# Altium PCB STM_System_Board.PCBDOC (part 1 of 16)
Units mm, origin at the board's own origin, x right, y up, seen from the top; angles counter-clockwise.
Board outline 222.53 x 100.01 mm, 6 copper layers (Top Layer, Int1 (GND), Int2 (Sign), Layer 1, Layer 2, Bottom Layer), stack 1.526 mm thick; 702 components, 774 nets, 3596 pads, 1988 vias.
Unrouted connection lines stored in the file: 1.
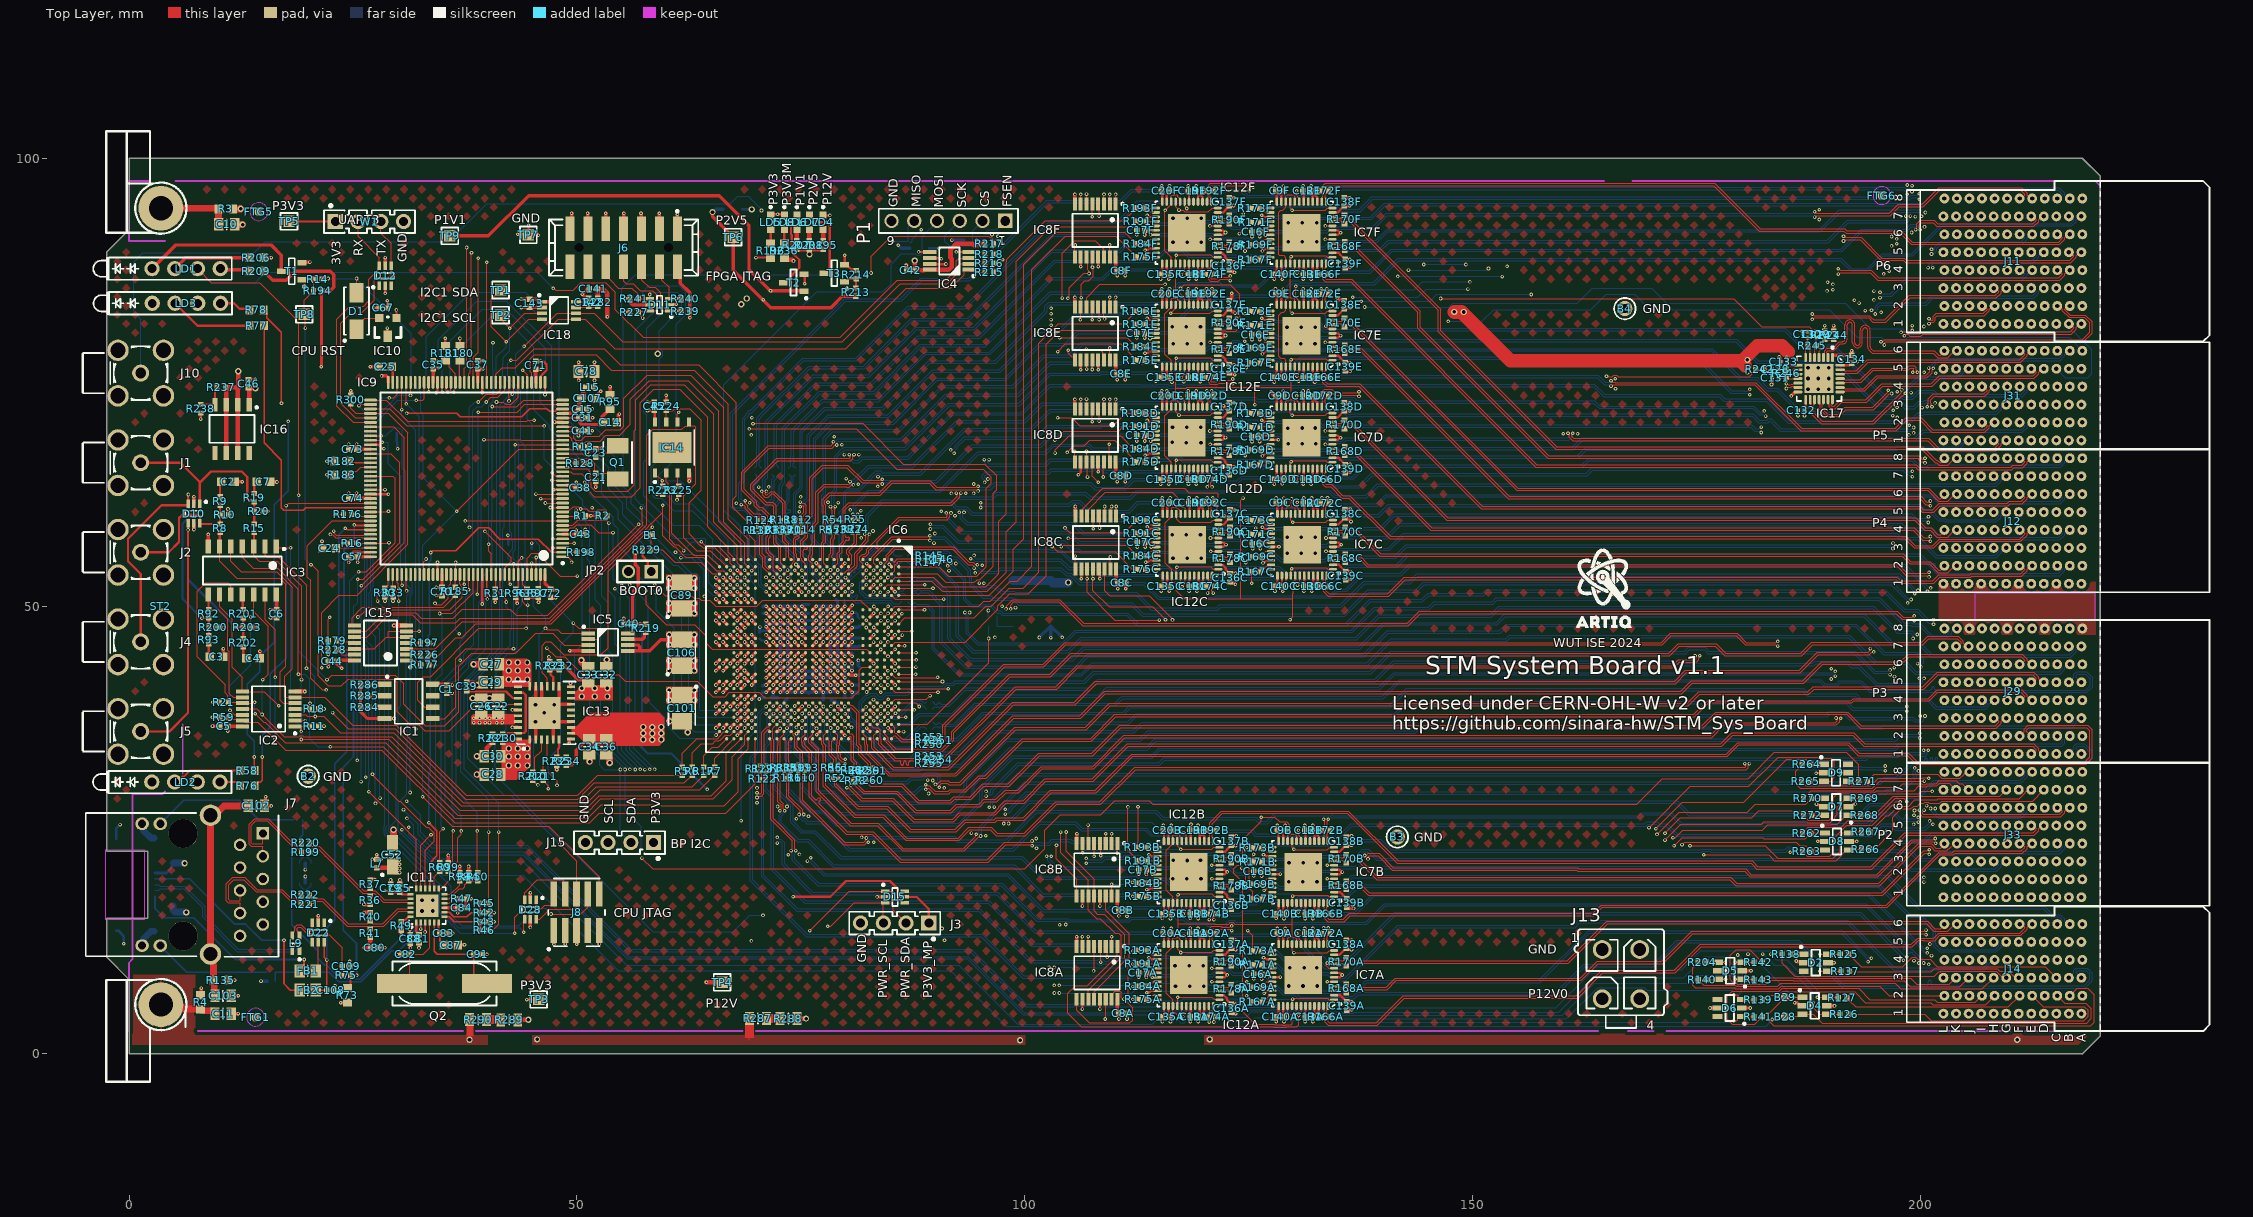
[diagram p0: Top Layer view]
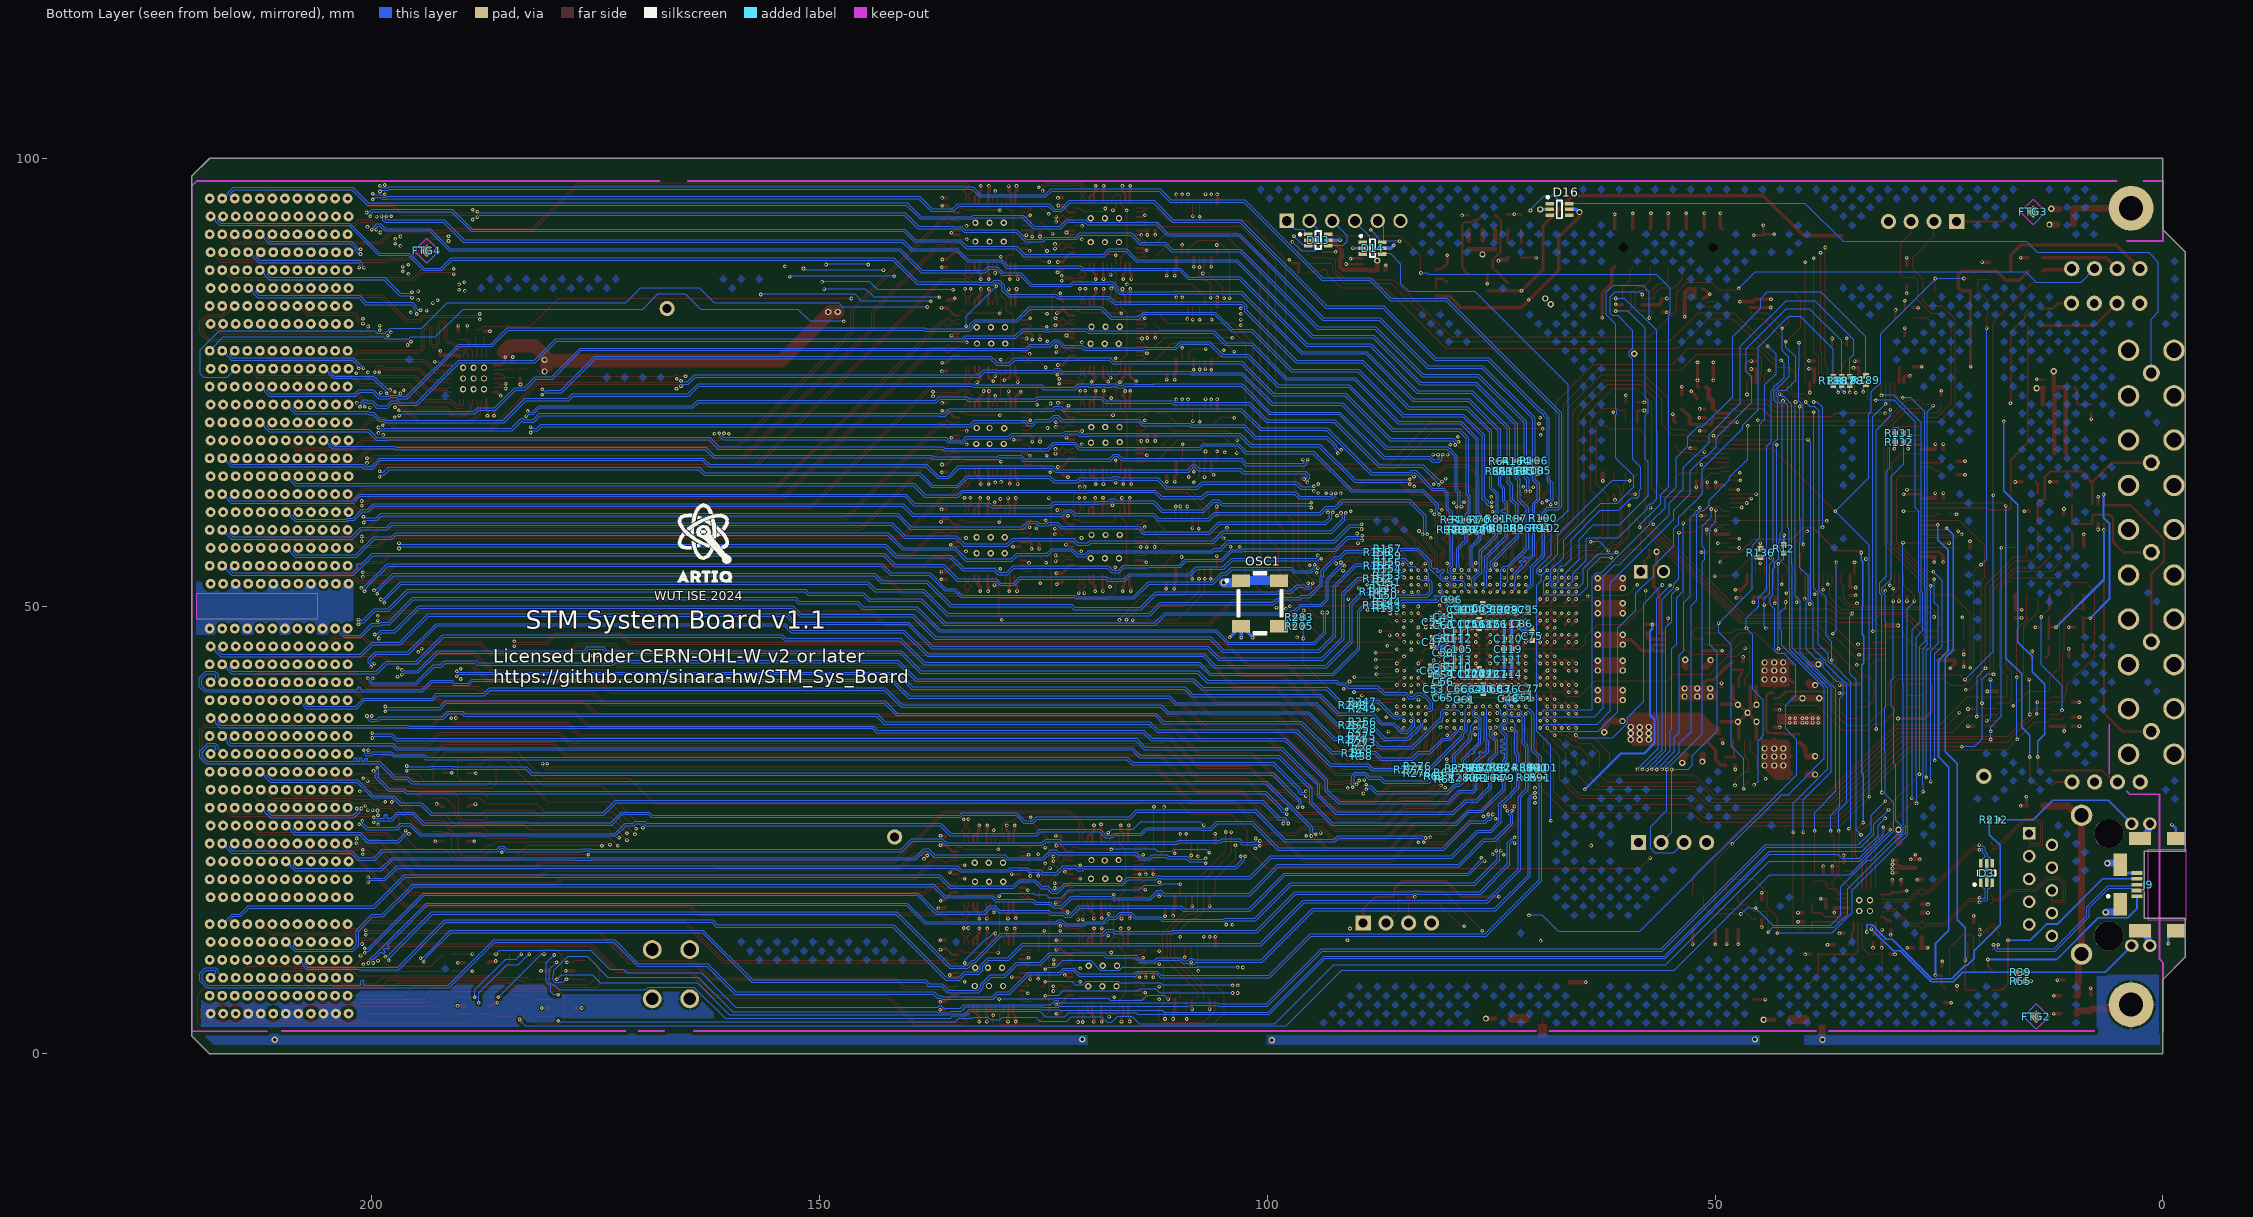
[diagram p1: Bottom Layer view, seen from below]
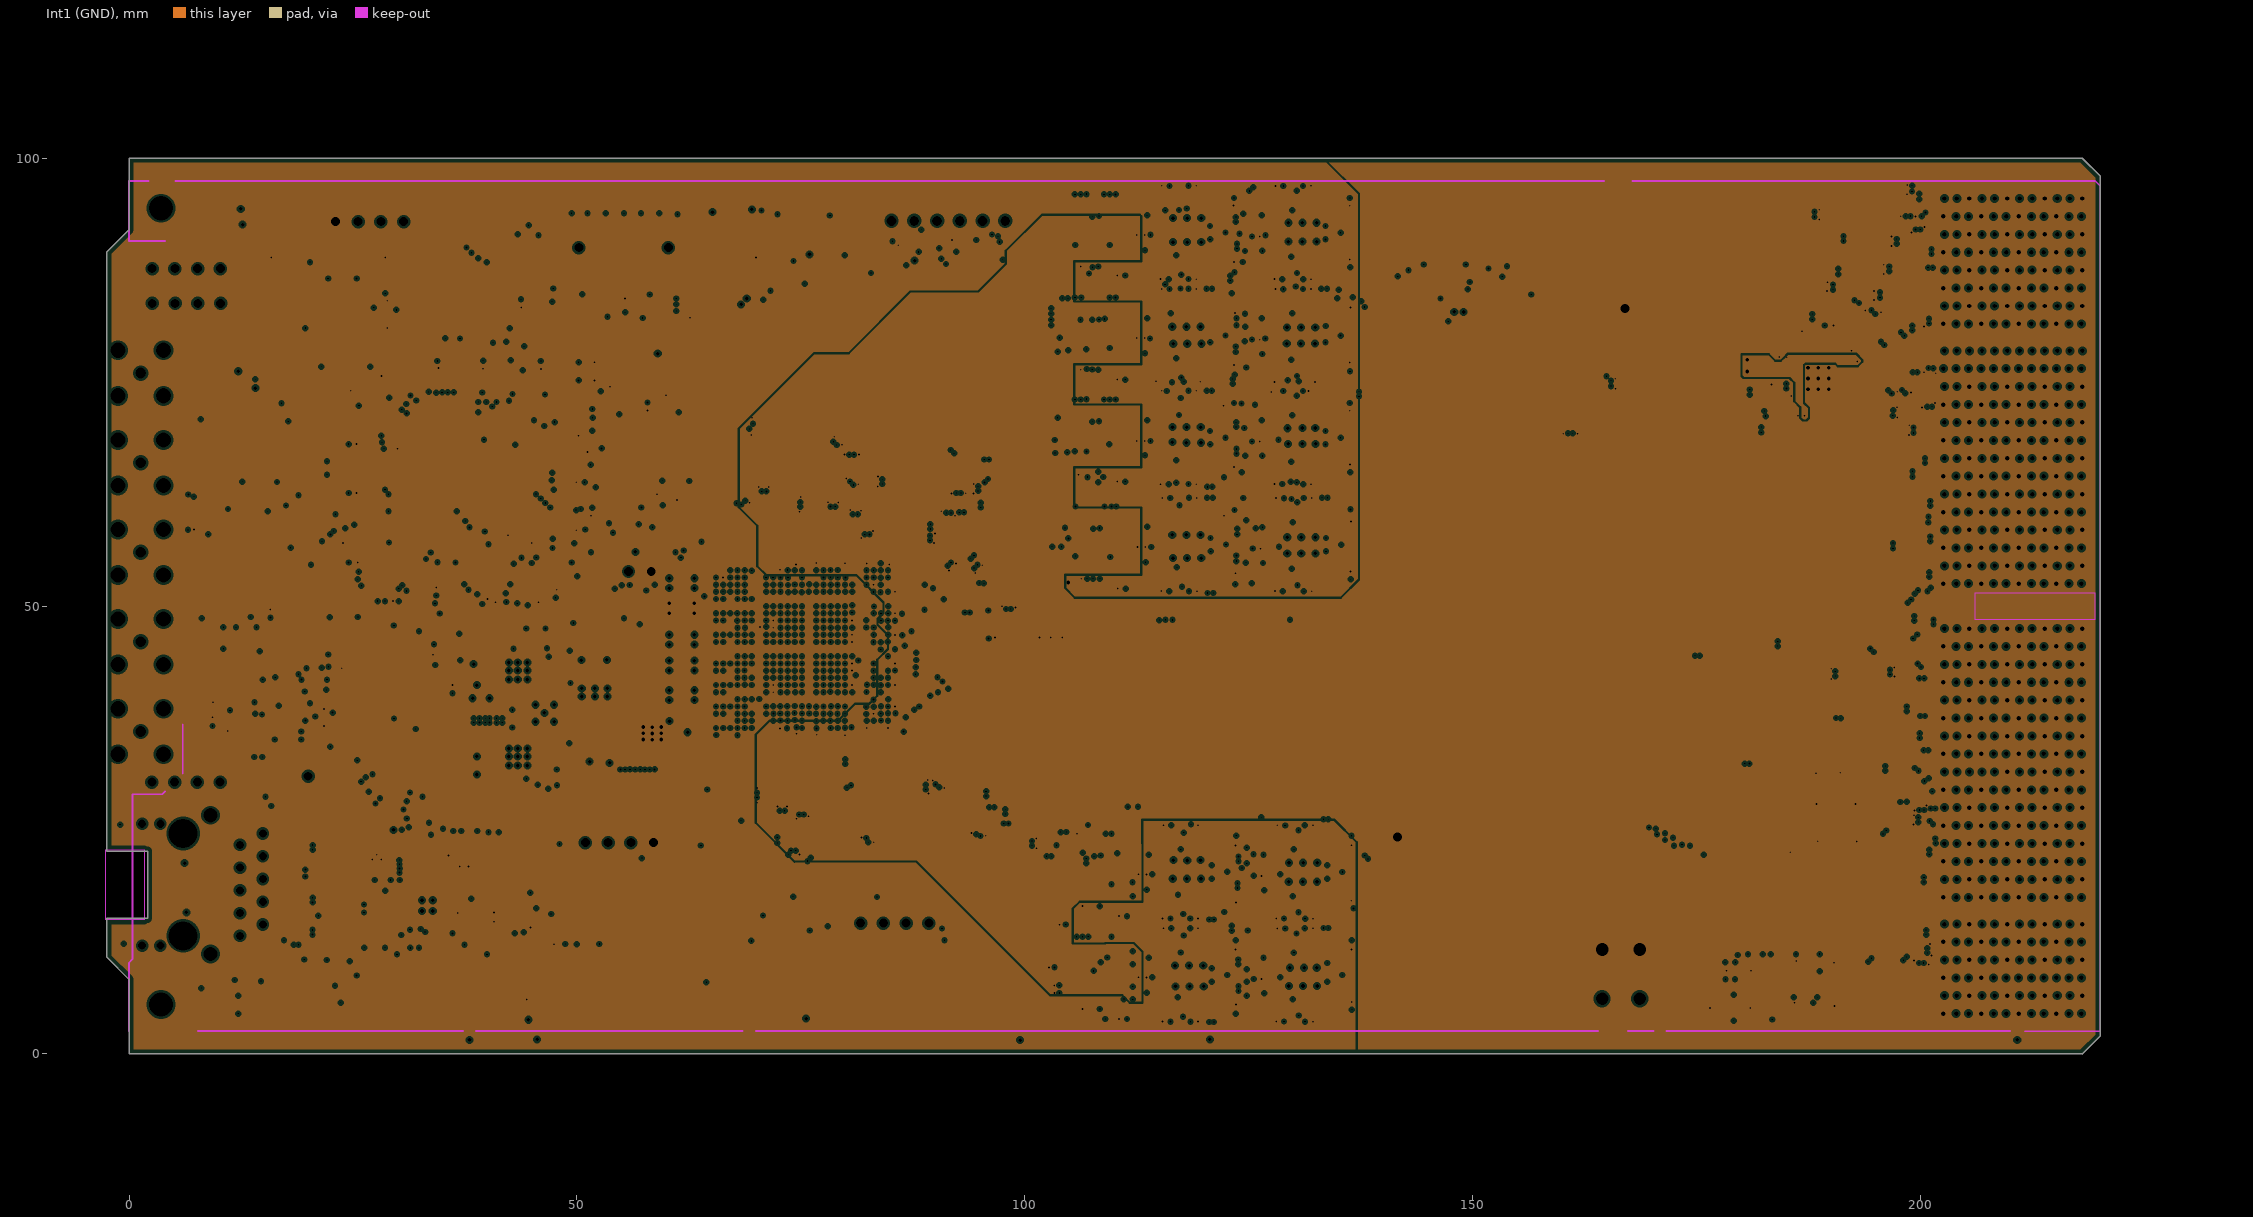
[diagram p2: Int1 (GND), clearances drawn from the general rule]
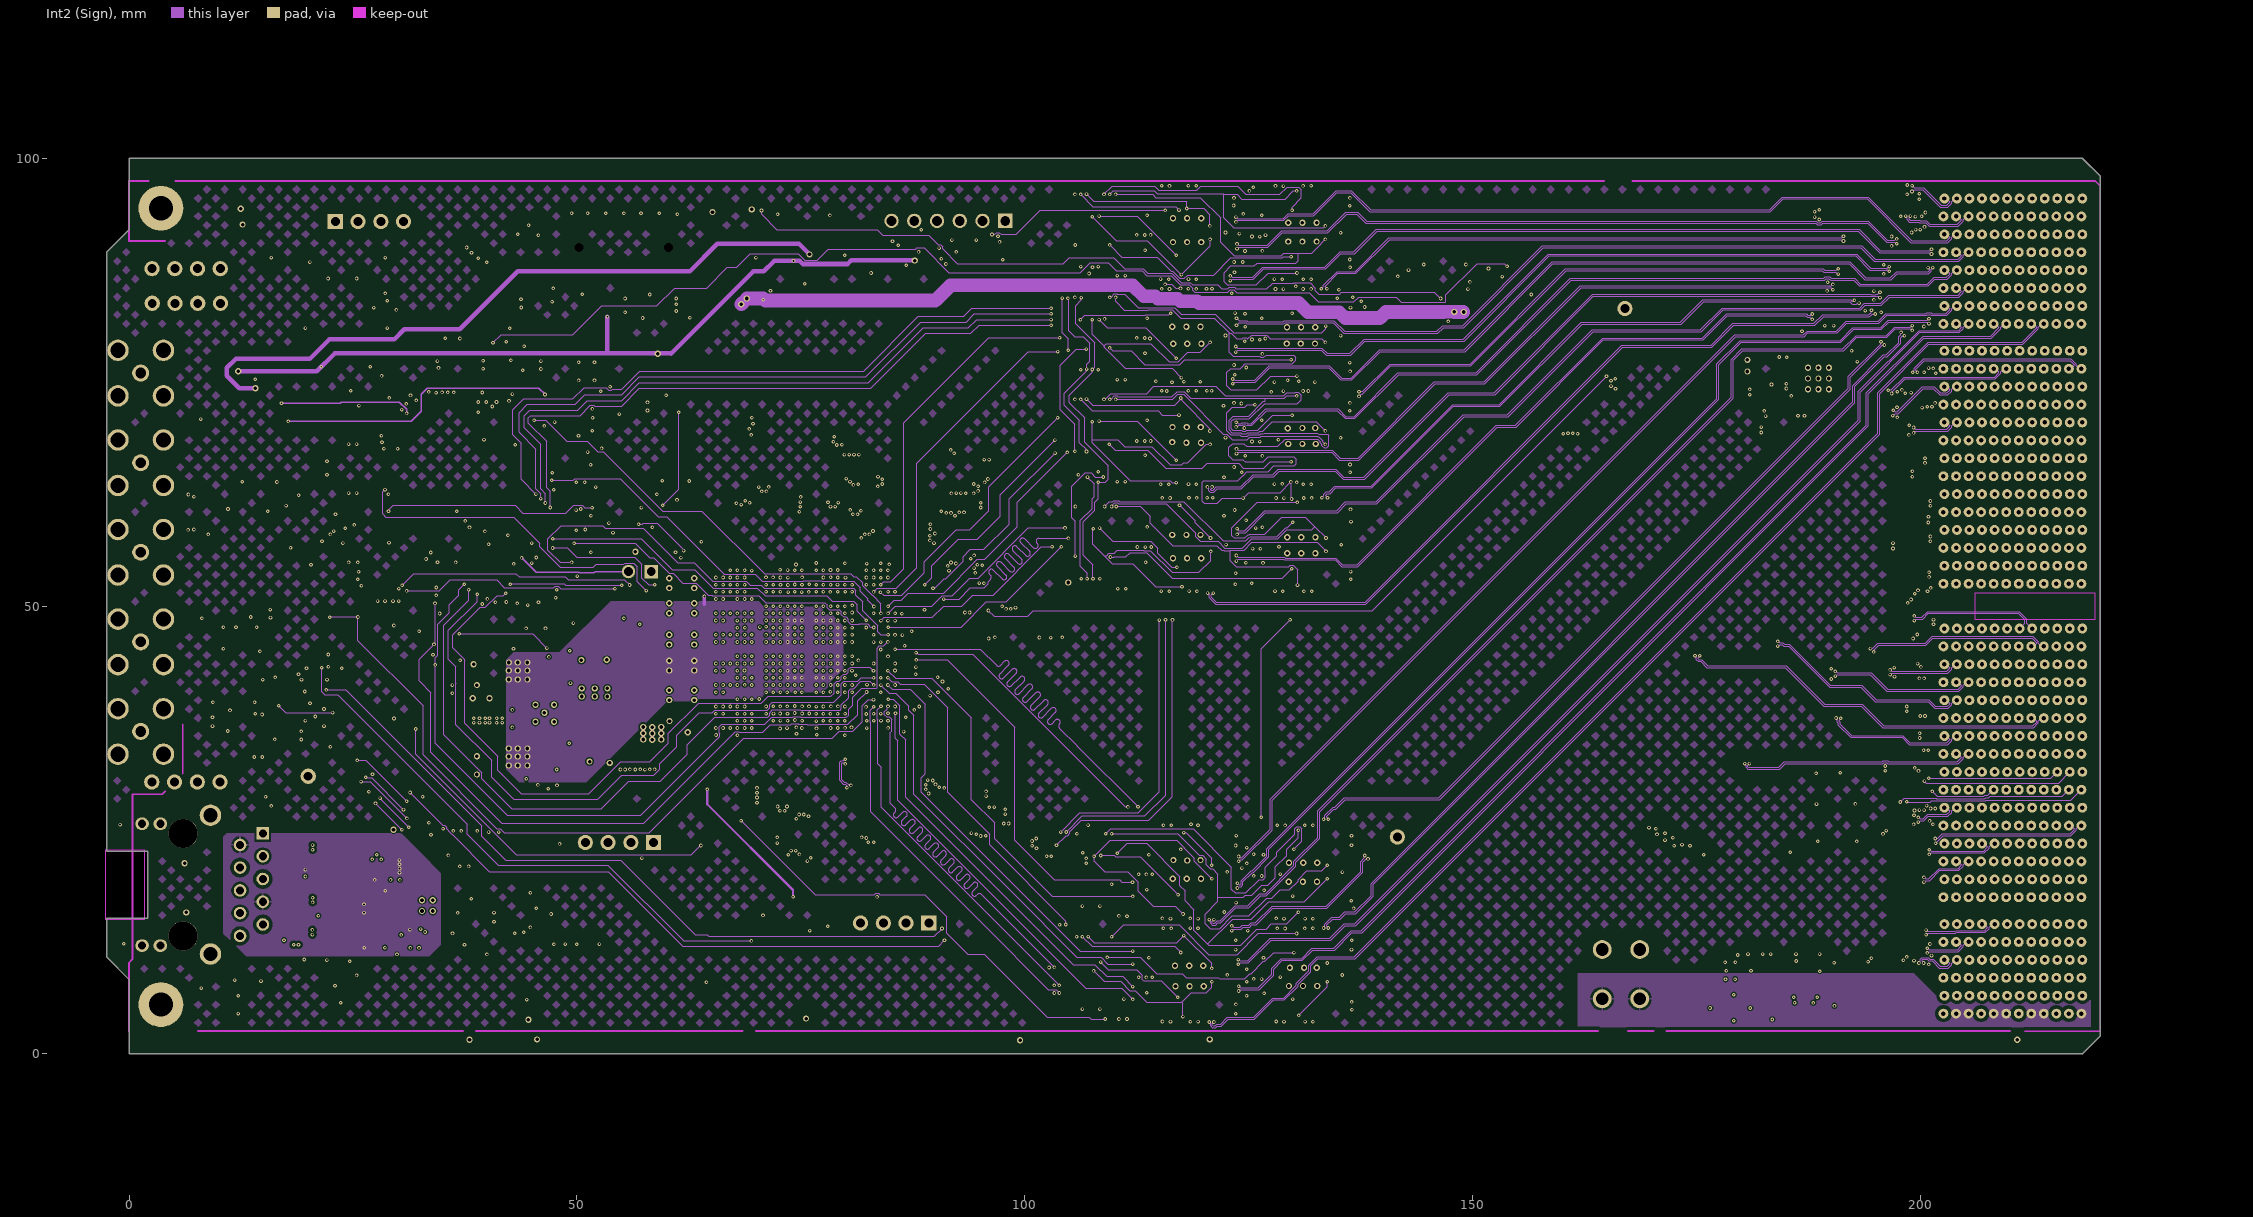
[diagram p3: Int2 (Sign)]
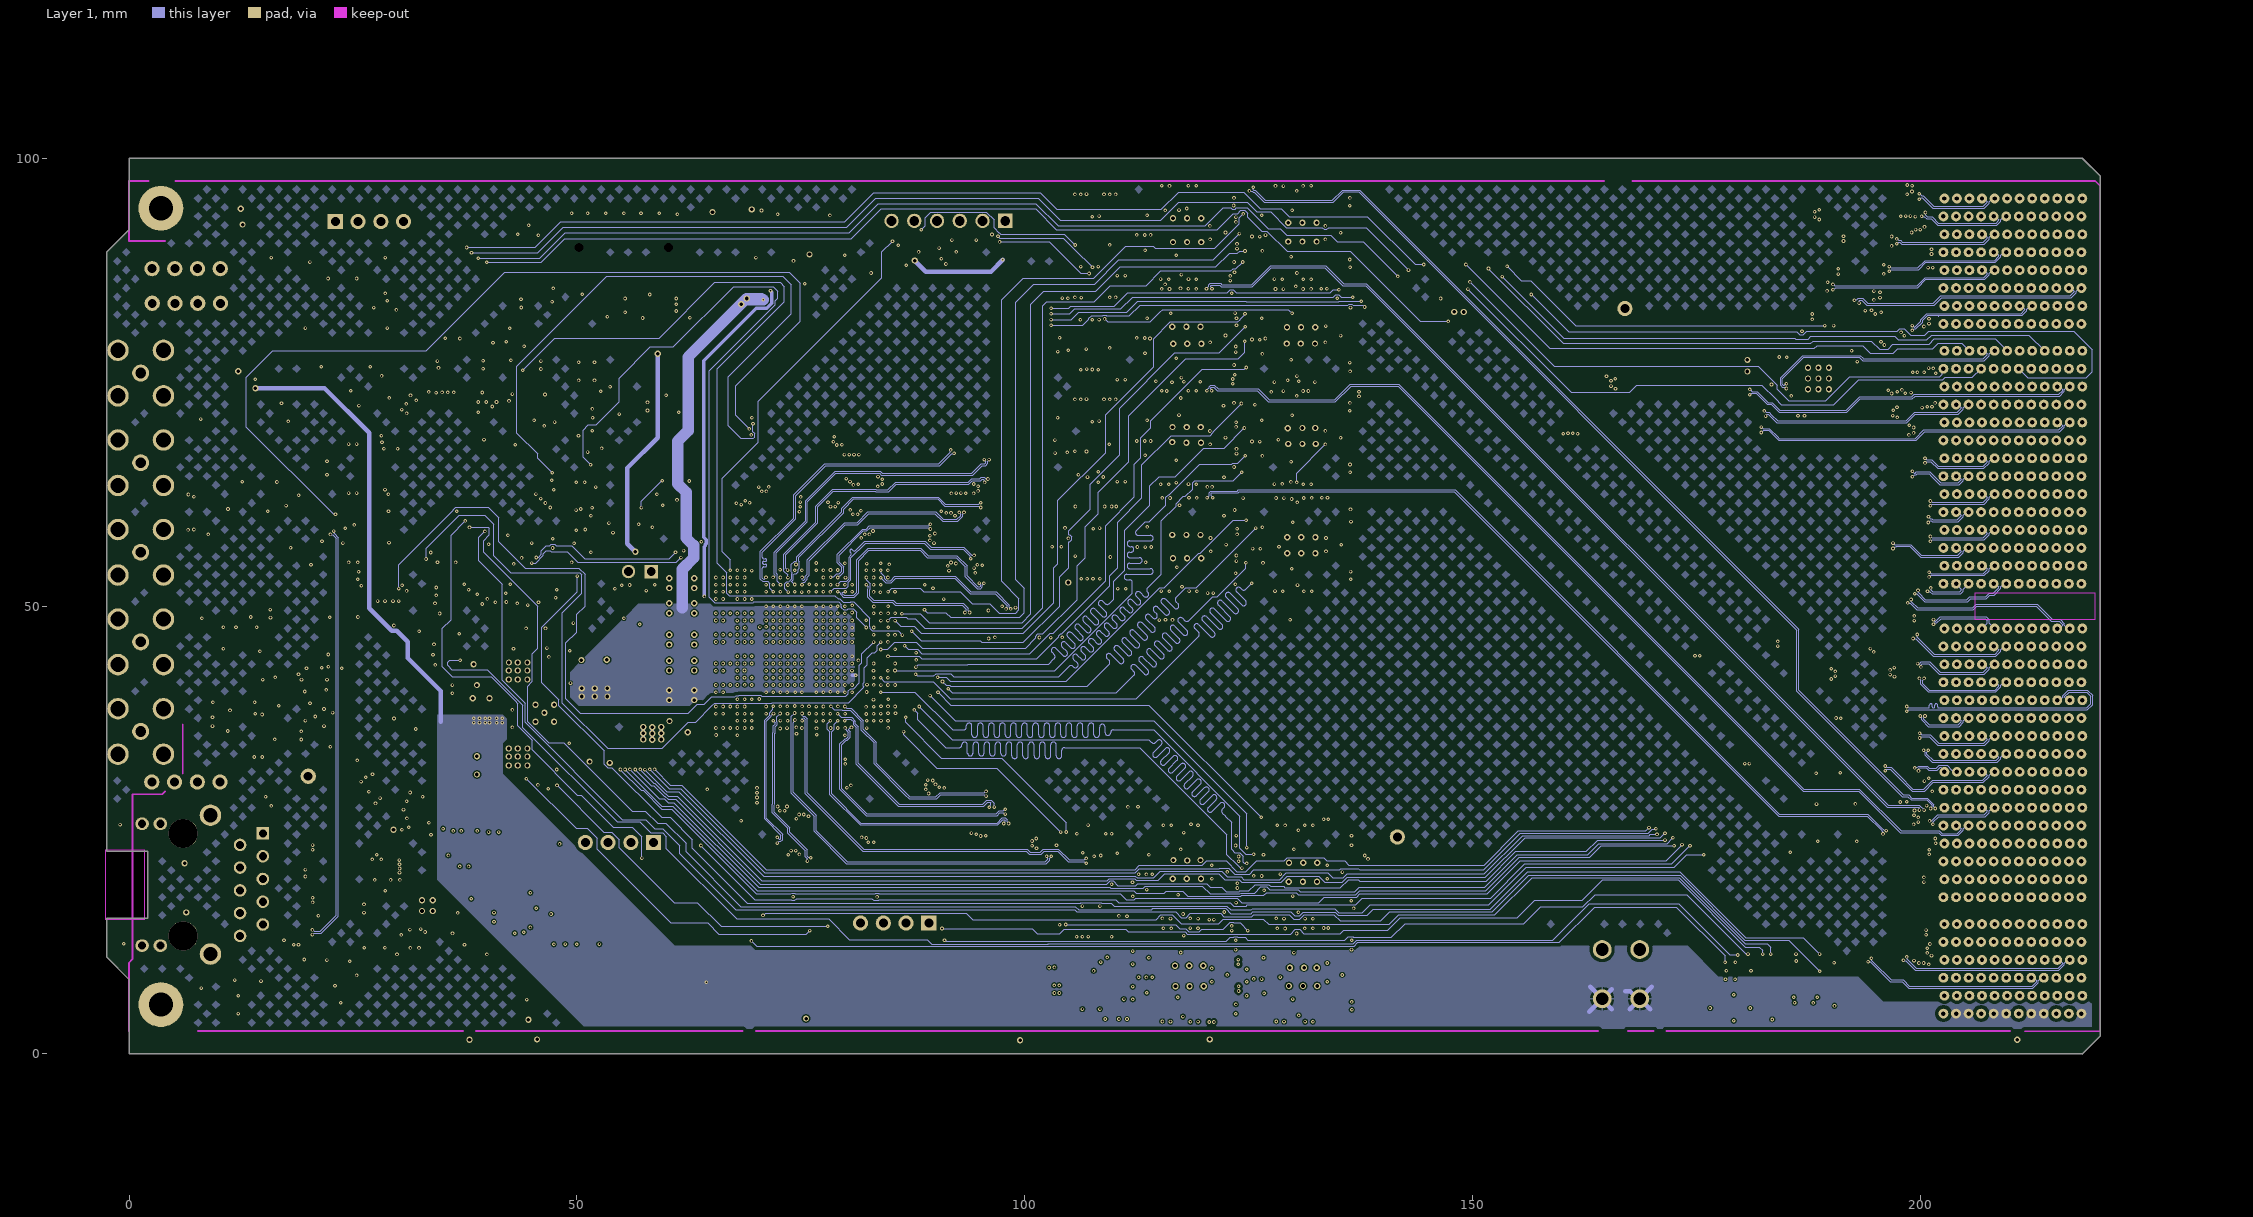
[diagram p4: Layer 1]
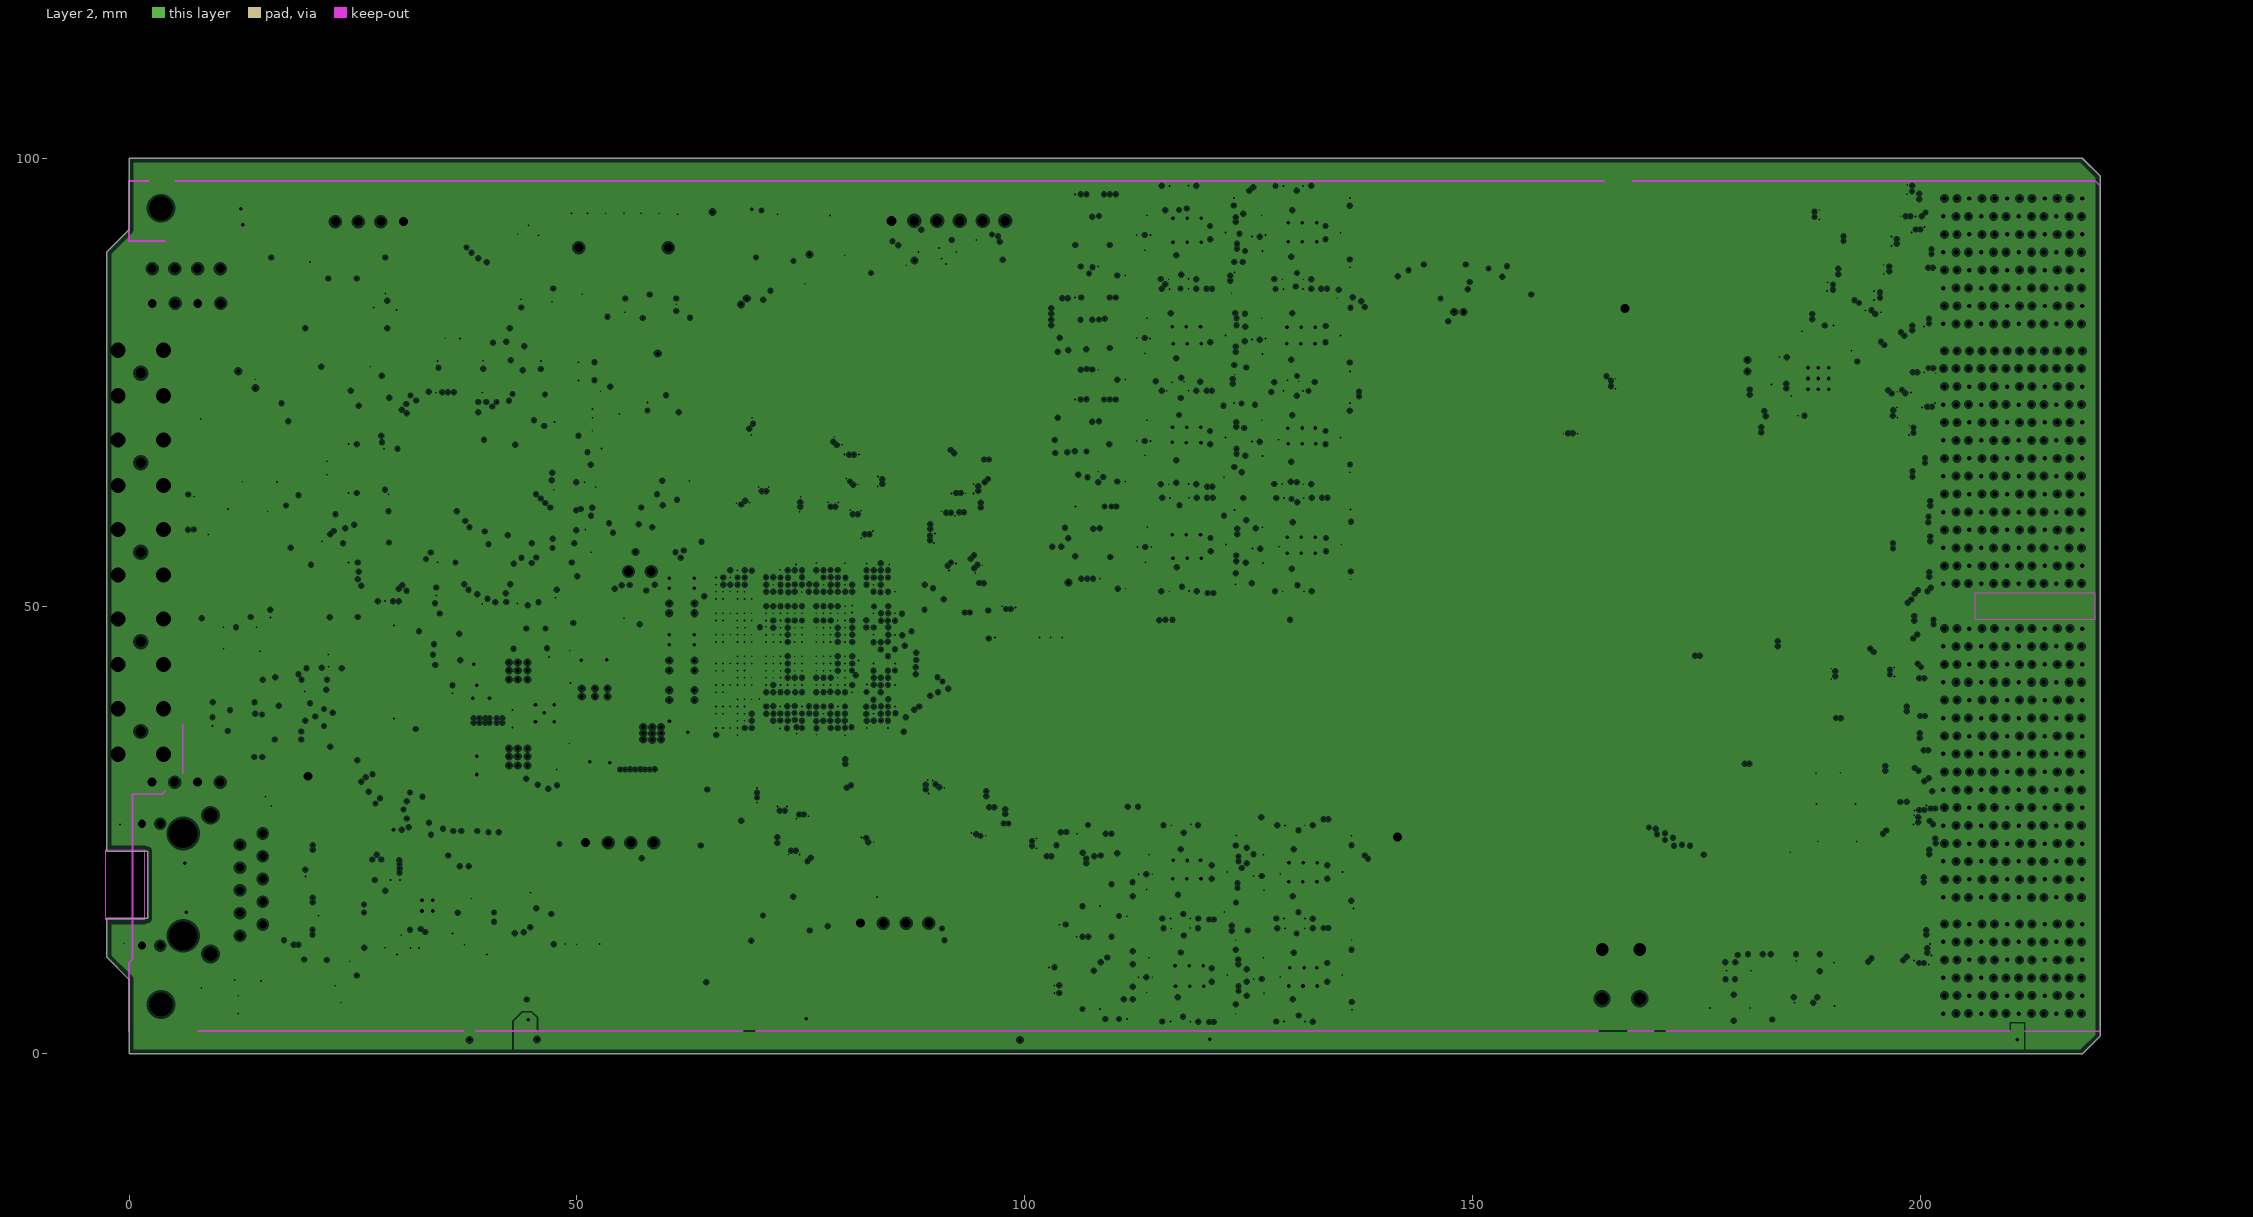
[diagram p5: Layer 2, clearances drawn from the general rule]
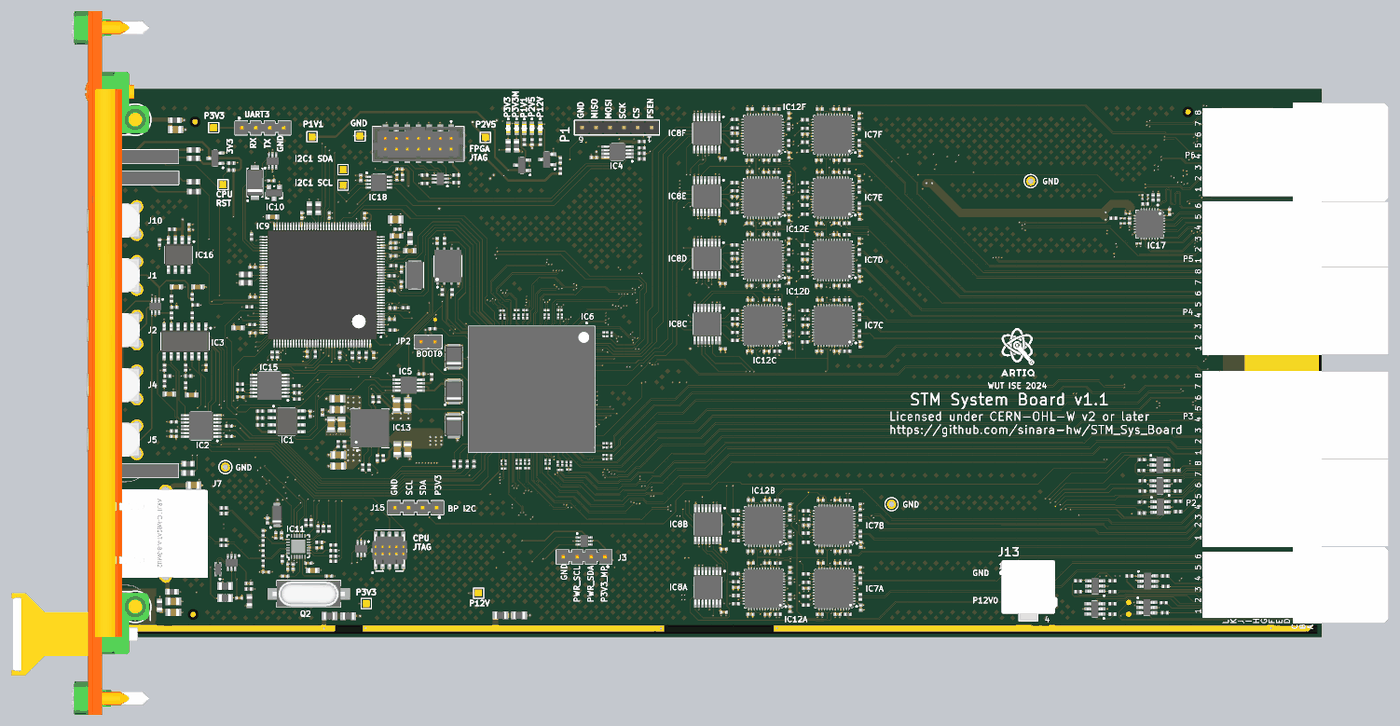
[diagram p20: 3D render of the assembled board from above, using the file's embedded part models]
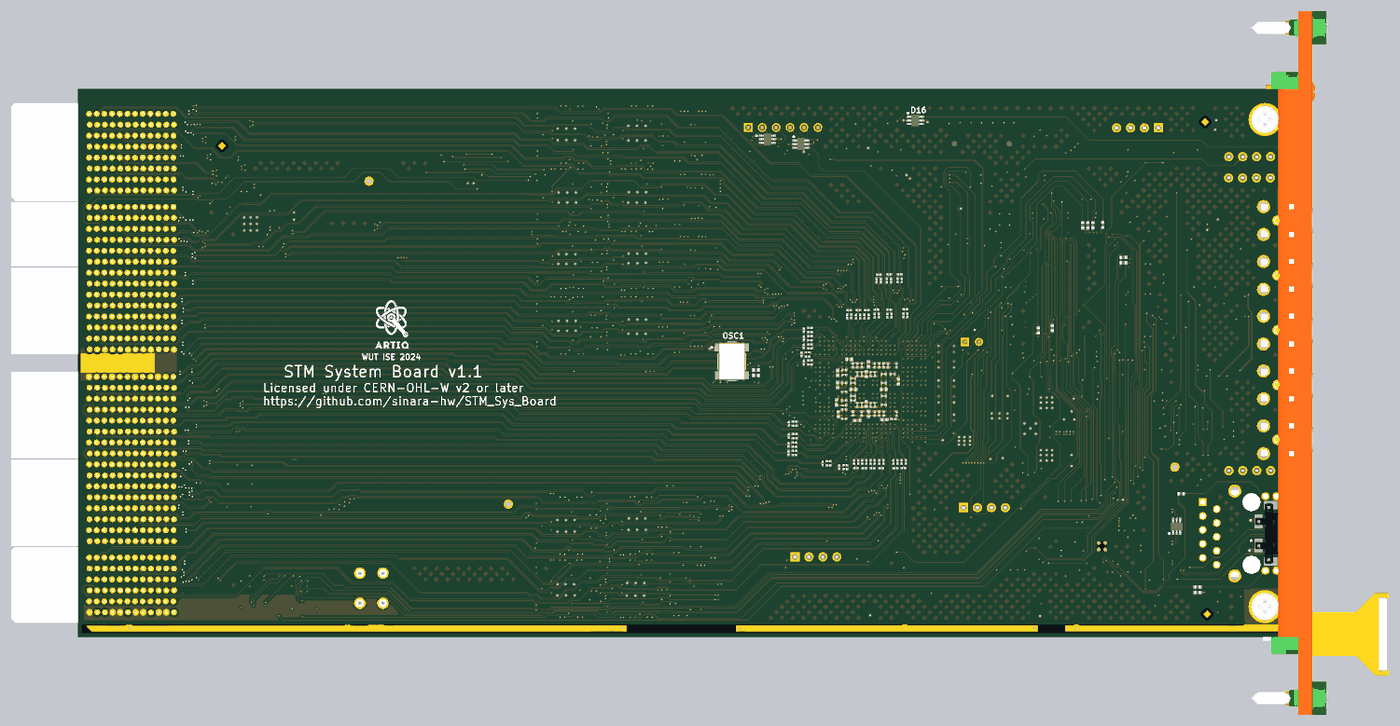
[diagram p21: 3D render of the assembled board from below, using the file's embedded part models]

## Layer stack, top to bottom
Top Solder: solder mask 0.0254, SM-001, Dk 4
Top Layer: signal copper 0.053
Dielectric 1: core 0.11, FR4, Dk 4.2
Int1 (GND): plane copper 0.0175, net (Multiple Nets)
Dielectric 3: prepreg 0.2, Core-027, Dk 4.2
Int2 (Sign): signal copper 0.0175
Dielectric 6: core 0.73, Core-027, Dk 4.2
Layer 1: signal copper 0.0175
Dielectric 2: prepreg 0.2, Core-027, Dk 4.2
Layer 2: plane copper 0.0175, net (Multiple Nets)
Dielectric 4: core 0.11, FR4, Dk 4.2
Bottom Layer: signal copper 0.053
Board Layer Stack Bottom Solder: solder mask 0.0254, SM-001, Dk 4

## Board outline
-2.489,15.138 -1.854,15.138 -1.847,15.145 2.062,15.145 2.062,22.645 -2.489,22.645 -2.489,89.511 0,92 0,100 218.039,100 218.039,99.99 220.039,97.99 220.039,1.99 218.039,-0.01 218.039,0 0,0 0,8.32 -2.489,10.809
cut-out: -2.6,22.784 -2.384,22.784 1.689,22.784 1.689,14.961 -2.6,14.961

## Design rules (kind name [scope] priority, off if disabled: settings)
AcuteAngle [All] p1: minimum=4.00000000000000E+0001 checktracksonly=FALSE
BoardOutlineClearance [not (OnLayer('TopOverlay')  or  OnLayer('BottomOverlay') )] p1: gap=0.254 ignorepadtopadclearanceinfootprint=FALSE except(0: Arc-SplitContinuation Track-SplitContinuation SMDPad-SplitContinuation THPad-SplitContinuation Via-SplitContinuation Fill-SplitContinuation Poly-SplitContinuation Region-SplitContinuation Text-SplitContinuation)
Clearance Clearance_HV [InNetClass('HV') vs not InNetClass('HV')] p1: gap=1 ignorepadtopadclearanceinfootprint=FALSE
Clearance Clearance_balancing [InPolygonClass('Copper_balancing') vs OnLayer('KeepOutLayer')] p2: gap=0.25 ignorepadtopadclearanceinfootprint=FALSE
Clearance Clearance_balancing_1 [InPolygonClass('Copper_balancing')] p3: gap=1 ignorepadtopadclearanceinfootprint=FALSE
Clearance Clearance_DIFF_1 [(InDifferentialPairClass('All Differential Pairs')) vs (InDifferentialPairClass('All Differential Pairs'))] p4 off: gap=0.3 ignorepadtopadclearanceinfootprint=FALSE except(0.127: Arc-SMDPad Arc-THPad Arc-Via Track-SMDPad Track-THPad Track-Via SMDPad-SMDPad SMDPad-THPad THPad-THPad Via-Via)
Clearance Clearance_DIFF [(InDifferentialPairClass('All Differential Pairs'))] p5: gap=0.127 ignorepadtopadclearanceinfootprint=FALSE except(0: Arc-Hole Track-Hole SMDPad-Hole THPad-Hole Via-Hole Fill-Hole Poly-Hole Region-Hole Text-Hole; 0.095: Track-Track; 0.1: Arc-Track; 0.254: Arc-Poly Track-Poly SMDPad-Poly THPad-Poly Via-Poly Fill-Poly Poly-Poly Poly-Region Poly-Text)
Clearance Clearance_DIFF_2 [(InDifferentialPairClass('All Differential Pairs'))] p6: gap=0.127 ignorepadtopadclearanceinfootprint=FALSE except(0: Arc-Hole Track-Hole SMDPad-Hole THPad-Hole Via-Hole Fill-Hole Poly-Hole Region-Hole Text-Hole; 0.254: Arc-Poly Track-Poly SMDPad-Poly THPad-Poly Via-Poly Fill-Poly Poly-Poly Poly-Region Poly-Text)
Clearance [All] p7: gap=0.127 ignorepadtopadclearanceinfootprint=FALSE except(0: Arc-Hole Track-Hole SMDPad-Hole THPad-Hole Via-Hole Fill-Hole Poly-Hole Region-Hole Text-Hole; 0.381: Arc-Poly Track-Poly SMDPad-Poly THPad-Poly Fill-Poly Poly-Poly)
ComponentClearance [All] p1 off: gap=0.254 collisioncheckmode=3 verticalgap=0.254 showdistances=FALSE
DiffPairsRouting [All] p1: maxlimit=0.172 minlimit=0.112 mostfreqgap=0.172 toplayer_mingap=0.172 toplayer_minwidth=0.095 toplayer_maxwidth=0.095 toplayer_prefwidth=0.095 midlayer1_maxgap=0.112 midlayer1_prefgap=0.112 midlayer1_minwidth=0.102 midlayer1_maxwidth=0.102 midlayer1_prefwidth=0.102 midlayer4_maxgap=0.112 midlayer4_prefgap=0.112 midlayer4_minwidth=0.102 midlayer4_maxwidth=0.102 midlayer4_prefwidth=0.102 bottomlayer_mingap=0.172 bottomlayer_minwidth=0.095 bottomlayer_maxwidth=0.095 bottomlayer_prefwidth=0.095 impedanceprofiledriven=TRUE impedanceprofileid={173B4F02-02DC-42C5-B21D-76EDD5FCFF41} impedanceprofilevalue=100.000000 maxuncoupledlength=12.7
FabricationTestPointUsage TestPointUsage [All] p1: valid=0 allowmultiple=FALSE
FabricationTestpoint Testpoint [All] p1: side=3 testpointundercomponent=TRUE minsize=1.016 maxsize=2.54 preferedsize=1.524 minholesize=0.508 maxholesize=1.016 preferedholesize=0.813 testpointgrid=0.025 allowsidetop=TRUE allowsidebottom=TRUE usegrid=TRUE gridtolerance=0
Height [All] p1 off: minheight=0 maxheight=25.4 prefheight=12.7
HoleSize [All] p1: absolutevalues=TRUE maxlimit=3.81 minlimit=0.025 maxpercent=80.000 minpercent=20.000
HoleToHoleClearance [All] p1: gap=0.025 allowstackedmicrovias=TRUE
MatchedLengths MatchLengths_FPGA_BP [InxSignalClass('LVDS_BP')] p1: tolerance=1 checknetsindiffpair=FALSE checkdiffpairvsdiffpair=TRUE checkxsignals=TRUE checkothers=TRUE usedelayunits=TRUE delaytolerance=500.000000 targetsourcename=SLOT1.LVDSr0_N-SLOT1.LVDS_0_N_PP1
MatchedLengths MatchLengths_FPGA_BP_1 [InxSignalClass('SE_BP')] p2: tolerance=1 checknetsindiffpair=FALSE checkdiffpairvsdiffpair=TRUE checkxsignals=TRUE checkothers=TRUE usedelayunits=TRUE delaytolerance=400.000000
MatchedLengths MatchedLengths_1 [InDifferentialPairClass('PE_CLK')] p3: tolerance=25.4 checknetsindiffpair=FALSE checkdiffpairvsdiffpair=TRUE checkxsignals=TRUE checkothers=TRUE usedelayunits=TRUE delaytolerance=100.000000
MatchedLengths [All] p4: tolerance=0.508 checknetsindiffpair=TRUE checkdiffpairvsdiffpair=FALSE checkxsignals=FALSE checkothers=FALSE usedelayunits=TRUE delaytolerance=10.000000
MinimumSolderMaskSliver [All] p1: minsoldermaskwidth=0.075
PlaneClearance PlaneClearance_HV [InNetClass('HV')] p1: clearance=1
PlaneClearance [All] p2: clearance=0.254
PlaneConnect [All] p1: planeconnectstyle=Direct reliefexpansion=0.508 reliefentries=4 reliefconductorwidth=0.254 reliefairgap=0.254
PolygonConnect PolygonConnect_1 [All vs InComponentClass('Pressfit')] p1: thpad.connectstyle=Direct thpad.reliefconductorwidth=0.254 thpad.reliefentries=4 thpad.polygonreliefangle="90 Angle" thpad.airgapwidth=0.254 smdpad.connectstyle=Relief smdpad.reliefconductorwidth=0.254 smdpad.reliefentries=4 smdpad.polygonreliefangle="90 Angle" smdpad.airgapwidth=0.254 via.connectstyle=Direct via.reliefconductorwidth=0.254 via.reliefentries=4 via.polygonreliefangle="90 Angle" via.airgapwidth=0.254
PolygonConnect [All] p2: thpad.connectstyle=Relief thpad.reliefconductorwidth=0.254 thpad.reliefentries=4 thpad.polygonreliefangle="90 Angle" thpad.airgapwidth=0.254 smdpad.connectstyle=Relief smdpad.reliefconductorwidth=0.254 smdpad.reliefentries=4 smdpad.polygonreliefangle="90 Angle" smdpad.airgapwidth=0.254 via.connectstyle=Direct via.reliefconductorwidth=0.254 via.reliefentries=4 via.polygonreliefangle="90 Angle" via.airgapwidth=0.254
RoomDefinition U_LVDS_Driver4 [InComponentClass('U_LVDS_Driver4')] p1 off: confinementstyle=ConfineIn formatcopy=TRUE lockcomponents=FALSE outline 104.75,63.348 136.55,63.348 136.55,74.27 104.75,74.27
RoomDefinition CPU [InComponentClass('CPU')] p2 off: confinementstyle=ConfineIn formatcopy=TRUE lockcomponents=FALSE outline 1.951,169.705 1.951,133.281 -51.109,133.281 -51.109,169.705
RoomDefinition U_ST_SYS_Board_Clocking [InComponentClass('U_ST_SYS_Board_Clocking')] p3 off: confinementstyle=ConfineIn formatcopy=TRUE lockcomponents=FALSE outline 172.706,70.86 172.706,78.118 185.221,78.118 185.221,79.343 186.693,79.343 186.693,79.831 186.746,79.831 186.746,81.343 188.521,81.343 188.521,81.403 191.054,81.403 191.054,79.343 192.079,79.343 192.079,78.728 193.079,78.728 193.079,76.35 192.079,76.35 192.079,71.96 187.679,71.96 187.679,71.21 181.279,71.21 181.279,70.86
RoomDefinition U_STM_System_Board_Supply [InComponentClass('U_STM_System_Board_Supply')] p4 off: confinementstyle=ConfineIn formatcopy=TRUE lockcomponents=FALSE outline 87.527,110.084 101.829,110.084 101.829,94.492 87.527,94.492
RoomDefinition U_LVDS_Driver3 [InComponentClass('U_LVDS_Driver3')] p5: confinementstyle=ConfineIn formatcopy=TRUE lockcomponents=FALSE outline 104.826,51.384 136.601,51.384 136.601,62.332 104.826,62.332
RoomDefinition U_LVDS_Driver6 [InComponentClass('U_LVDS_Driver6')] p6 off: confinementstyle=ConfineIn formatcopy=TRUE lockcomponents=FALSE outline 104.75,86.233 136.55,86.233 136.55,97.155 104.75,97.155
RoomDefinition U_ST_SYS_Board_FPGA_SUP [InComponentClass('U_ST_SYS_Board_FPGA_SUP')] p7 off: confinementstyle=ConfineIn formatcopy=TRUE lockcomponents=FALSE outline 173.888,106.807 149.454,106.807 149.454,140.531 173.888,140.531
RoomDefinition U_ST_SYS_Board_Config [InComponentClass('U_ST_SYS_Board_Config')] p8 off: confinementstyle=ConfineIn formatcopy=TRUE lockcomponents=FALSE outline 99.924,25.298 61.443,25.298 61.443,2.413 99.924,2.413
RoomDefinition U_DIO_buffer [InComponentClass('U_DIO_buffer')] p9 off: confinementstyle=ConfineIn formatcopy=TRUE lockcomponents=FALSE outline 10.376,42.545 31.738,42.545 31.738,59.055 10.376,59.055
RoomDefinition STM_System_Board [InComponentClass('STM_System_Board')] p10 off: confinementstyle=ConfineIn formatcopy=TRUE lockcomponents=FALSE outline 179.146,1.753 206.959,1.753 206.959,15.951 179.146,15.951
RoomDefinition U_LVDS_Driver5 [InComponentClass('U_LVDS_Driver5')] p11 off: confinementstyle=ConfineIn formatcopy=TRUE lockcomponents=FALSE outline 104.75,74.727 136.55,74.727 136.55,85.649 104.75,85.649
RoomDefinition U_ST_SYS_Board_FPGA [InComponentClass('U_ST_SYS_Board_FPGA')] p12 off: confinementstyle=ConfineIn formatcopy=TRUE lockcomponents=FALSE outline 195.097,89.484 182.601,89.484 182.601,97.866 195.097,97.866
RoomDefinition U_LVDS_Driver2 [InComponentClass('U_LVDS_Driver2')] p13 off: confinementstyle=ConfineIn formatcopy=TRUE lockcomponents=FALSE outline 104.953,14.859 136.728,14.859 136.728,25.781 104.953,25.781
RoomDefinition U_LVDS_Driver1 [InComponentClass('U_LVDS_Driver1')] p14 off: confinementstyle=ConfineIn formatcopy=TRUE lockcomponents=FALSE outline 104.953,3.353 136.728,3.353 136.728,14.275 104.953,14.275
RoomDefinition U_Cpcis_connectors_P4_P5_P6 [InComponentClass('U_Cpcis_connectors_P4_P5_P6')] p15 off: confinementstyle=ConfineIn formatcopy=TRUE lockcomponents=FALSE outline 196.571,48.362 232.842,48.362 232.842,97.815 196.571,97.815
RoomDefinition U_Cpcis_connectors_P1_P2_P3 [InComponentClass('U_Cpcis_connectors_P1_P2_P3')] p16 off: confinementstyle=ConfineIn formatcopy=TRUE lockcomponents=FALSE outline 170.561,0.889 232.842,0.889 232.842,34.773 170.561,34.773
RoomDefinition USB [InComponentClass('USB')] p17 off: confinementstyle=ConfineIn formatcopy=TRUE lockcomponents=FALSE outline 29.696,2.5 44.855,2.5 44.855,10.94 29.696,10.94
RoomDefinition RMII_Ethernet [InComponentClass('RMII_Ethernet')] p18 off: confinementstyle=ConfineIn formatcopy=TRUE lockcomponents=FALSE outline 41.47,24.874 23.311,24.874 23.311,11.101 41.47,11.101
RoutingVias [All] p1: holewidth=0.2 width=0.4 viastyle="Through Hole" minholewidth=0.2 minwidth=0.4 maxholewidth=0.711 maxwidth=1.27 useviatemplates=TRUE viatemplateguid#1={CD8802BE-CEE0-4543-B7D6-63CEDC3EDE7B} viatemplateguid#2={CCEBBDA9-502D-499A-8255-F49B8ED9D916} viatemplatename#1=v40h20m0mx0 viatemplatename#2=v70h40m0mx0
SilkToSilkClearance [All] p1: silktosilkclearance=0
SilkToSolderMaskClearance SilkscreenOverComponentPads [IsPad] p1: minsilkscreentomaskgap=0.1 clearancetoexposedcopper=FALSE
SolderMaskExpansion [All] p1: expansion=0.051 istentingtop=FALSE
SupplyNets "Schematic Supply Nets_9" [InNet('P3V3_MP')] p1: voltage=0.000
SupplyNets "Schematic Supply Nets_8" [InNet('P5V0_MP')] p2: voltage=0.000
SupplyNets "Schematic Supply Nets_7" [InNet('P3V3')] p3: voltage=0.000
SupplyNets "Schematic Supply Nets_6" [InNet('AVDDT_PHY')] p4: voltage=0.000
SupplyNets "Schematic Supply Nets_5" [InNet('P1V1')] p5: voltage=0.000
SupplyNets "Schematic Supply Nets_4" [InNet('AVDD')] p6: voltage=0.000
SupplyNets "Schematic Supply Nets_3" [InNet('CHASSIS')] p7: voltage=0.000
SupplyNets "Schematic Supply Nets_2" [InNet('GND')] p8: voltage=0.000
SupplyNets "Schematic Supply Nets_1" [InNet('P2V5')] p9: voltage=0.000
SupplyNets "Schematic Supply Nets" [InNet('P12V0')] p10: voltage=0.000
UnRoutedNet [(Not InNet('CHASSIS')) and Not InPolygonClass('Copper_balancing')] p1:
Width Z50R [InNetClass('SPI')] p1: maxlimit=0.26 minlimit=0.163 preferedwidth=0.26 toplayer_maxwidth=0.163 toplayer_prefwidth=0.163 midlayer1_minwidth=0.26 midlayer4_minwidth=0.26 bottomlayer_maxwidth=0.163 bottomlayer_prefwidth=0.163 impedanceprofiledriven=TRUE impedanceprofileid={0A350B4F-2C77-4AA3-B206-457581DECF62} impedanceprofilevalue=50.000000 minimp=50.000000 maximp=50.000000 favimp=50.000000
Width [All] p2: maxlimit=12.7 minlimit=0.127 preferedwidth=0.127
17 further rules are at their usual default settings.

## Classes and differential pairs
polygon class Copper_balancing: bal_bot bal_int2 bal_l1 bal_top
net class ESD_STRIP: CHASSIS STRIP1 STRIP2
differential pair class PE_CLK: 1_PE_CLK 2_PE_CLK 3_PE_CLK 4_PE_CLK 5_PE_CLK 6_PE_CLK 7_PE_CLK 8_PE_CLK
component class Pressfit: J11 J12 J14 J29 J31 J33
net class MLVDS_RxTx1_[8..15]: MLVDS_RxTx1_8 MLVDS_RxTx1_9 MLVDS_RxTx1_10 MLVDS_RxTx1_11 MLVDS_RxTx1_12 MLVDS_RxTx1_13 MLVDS_RxTx1_14 MLVDS_RxTx1_15
net class BUF_IO: MLVDS_RxTx1_8 MLVDS_RxTx1_9 MLVDS_RxTx1_10 MLVDS_RxTx1_11 MLVDS_RxTx1_12 MLVDS_RxTx1_13 MLVDS_RxTx1_14 MLVDS_RxTx1_15 MLVDS_RxTx8B MLVDS_RxTx8C MLVDS_RxTx8D MLVDS_RxTx8E MLVDS_RxTx8F MLVDS_RxTx9B MLVDS_RxTx9C MLVDS_RxTx9D MLVDS_RxTx9E MLVDS_RxTx9F MLVDS_RxTx10B MLVDS_RxTx10C MLVDS_RxTx10D MLVDS_RxTx10E MLVDS_RxTx10F MLVDS_RxTx11B MLVDS_RxTx11C MLVDS_RxTx11D MLVDS_RxTx11E MLVDS_RxTx11F MLVDS_RxTx12B MLVDS_RxTx12C MLVDS_RxTx12D MLVDS_RxTx12E MLVDS_RxTx12F MLVDS_RxTx13B MLVDS_RxTx13C MLVDS_RxTx13D MLVDS_RxTx13E MLVDS_RxTx13F MLVDS_RxTx14B MLVDS_RxTx14C MLVDS_RxTx14D MLVDS_RxTx14E MLVDS_RxTx14F MLVDS_RxTx15B MLVDS_RxTx15C MLVDS_RxTx15D MLVDS_RxTx15E MLVDS_RxTx15F
net class LVDS: 1_PE_CLK_N 1_PE_CLK_P 2_PE_CLK_N 2_PE_CLK_P 3_PE_CLK_N 3_PE_CLK_P 4_PE_CLK_N 4_PE_CLK_P 5_PE_CLK_N 5_PE_CLK_P 6_PE_CLK_N 6_PE_CLK_P 7_PE_CLK_N 7_PE_CLK_P 8_PE_CLK_N 8_PE_CLK_P SLOT1.LVDS_0_N SLOT1.LVDS_0_P SLOT1.LVDS_1_N SLOT1.LVDS_1_P SLOT1.LVDS_2_N SLOT1.LVDS_2_P SLOT1.LVDS_3_N SLOT1.LVDS_3_P SLOT1.LVDS_4_N SLOT1.LVDS_4_P SLOT1.LVDS_5_N SLOT1.LVDS_5_P SLOT1.LVDS_6_N SLOT1.LVDS_6_P SLOT1.LVDS_7_N SLOT1.LVDS_7_P SLOT1.LVDS_8_N SLOT1.LVDS_8_P SLOT1.LVDS_9_N SLOT1.LVDS_9_P SLOT1.LVDS_10_N SLOT1.LVDS_10_P SLOT1.LVDS_11_N SLOT1.LVDS_11_P SLOT1.LVDS_12_N SLOT1.LVDS_12_P SLOT1.LVDS_13_N SLOT1.LVDS_13_P SLOT1.LVDS_14_N SLOT1.LVDS_14_P SLOT1.LVDS_15_N SLOT1.LVDS_15_P SLOT1.LVDSr0_N SLOT1.LVDSr0_P SLOT1.LVDSr1_N SLOT1.LVDSr1_P SLOT1.LVDSr3_N SLOT1.LVDSr3_P SLOT2.LVDS_0_N SLOT2.LVDS_0_P SLOT2.LVDS_1_N SLOT2.LVDS_1_P SLOT2.LVDS_2_N SLOT2.LVDS_2_P SLOT2.LVDS_3_N SLOT2.LVDS_3_P SLOT2.LVDS_4_N SLOT2.LVDS_4_P SLOT2.LVDS_5_N SLOT2.LVDS_5_P SLOT2.LVDS_6_N SLOT2.LVDS_6_P SLOT2.LVDS_7_N SLOT2.LVDS_7_P SLOT2.LVDS_8_N SLOT2.LVDS_8_P SLOT2.LVDS_9_N SLOT2.LVDS_9_P SLOT2.LVDS_10_N SLOT2.LVDS_10_P SLOT2.LVDS_11_N SLOT2.LVDS_11_P SLOT2.LVDS_12_N SLOT2.LVDS_12_P SLOT2.LVDS_13_N SLOT2.LVDS_13_P SLOT2.LVDS_14_N SLOT2.LVDS_14_P SLOT2.LVDS_15_N SLOT2.LVDS_15_P SLOT2.LVDSr0_N SLOT2.LVDSr0_P SLOT2.LVDSr1_N SLOT2.LVDSr1_P SLOT2.LVDSr3_N SLOT2.LVDSr3_P SLOT3.LVDS_0_N SLOT3.LVDS_0_P SLOT3.LVDS_1_N SLOT3.LVDS_1_P SLOT3.LVDS_2_N SLOT3.LVDS_2_P SLOT3.LVDS_3_N SLOT3.LVDS_3_P SLOT3.LVDS_4_N SLOT3.LVDS_4_P SLOT3.LVDS_5_N SLOT3.LVDS_5_P SLOT3.LVDS_6_N SLOT3.LVDS_6_P SLOT3.LVDS_7_N SLOT3.LVDS_7_P SLOT3.LVDS_8_N SLOT3.LVDS_8_P SLOT3.LVDS_9_N SLOT3.LVDS_9_P SLOT3.LVDS_10_N SLOT3.LVDS_10_P SLOT3.LVDS_11_N SLOT3.LVDS_11_P SLOT3.LVDS_12_N SLOT3.LVDS_12_P SLOT3.LVDS_13_N SLOT3.LVDS_13_P SLOT3.LVDS_14_N SLOT3.LVDS_14_P SLOT3.LVDS_15_N SLOT3.LVDS_15_P SLOT3.LVDSr0_N SLOT3.LVDSr0_P SLOT3.LVDSr1_N SLOT3.LVDSr1_P SLOT3.LVDSr3_N SLOT3.LVDSr3_P SLOT4.LVDS_0_N SLOT4.LVDS_0_P SLOT4.LVDS_1_N SLOT4.LVDS_1_P SLOT4.LVDS_2_N SLOT4.LVDS_2_P SLOT4.LVDS_3_N SLOT4.LVDS_3_P SLOT4.LVDS_4_N SLOT4.LVDS_4_P SLOT4.LVDS_5_N SLOT4.LVDS_5_P SLOT4.LVDS_6_N SLOT4.LVDS_6_P SLOT4.LVDS_7_N SLOT4.LVDS_7_P SLOT4.LVDS_8_N SLOT4.LVDS_8_P SLOT4.LVDS_9_N SLOT4.LVDS_9_P SLOT4.LVDS_10_N SLOT4.LVDS_10_P SLOT4.LVDS_11_N SLOT4.LVDS_11_P SLOT4.LVDS_12_N SLOT4.LVDS_12_P SLOT4.LVDS_13_N SLOT4.LVDS_13_P SLOT4.LVDS_14_N SLOT4.LVDS_14_P SLOT4.LVDS_15_N SLOT4.LVDS_15_P SLOT4.LVDSr0_N SLOT4.LVDSr0_P SLOT4.LVDSr1_N SLOT4.LVDSr1_P SLOT4.LVDSr3_N SLOT4.LVDSr3_P SLOT5.LVDS_0_N SLOT5.LVDS_0_P SLOT5.LVDS_1_N SLOT5.LVDS_1_P SLOT5.LVDS_2_N SLOT5.LVDS_2_P SLOT5.LVDS_3_N SLOT5.LVDS_3_P SLOT5.LVDS_4_N SLOT5.LVDS_4_P SLOT5.LVDS_5_N SLOT5.LVDS_5_P SLOT5.LVDS_6_N SLOT5.LVDS_6_P SLOT5.LVDS_7_N SLOT5.LVDS_7_P SLOT5.LVDS_8_N SLOT5.LVDS_8_P SLOT5.LVDS_9_N SLOT5.LVDS_9_P SLOT5.LVDS_10_N SLOT5.LVDS_10_P SLOT5.LVDS_11_N SLOT5.LVDS_11_P SLOT5.LVDS_12_N SLOT5.LVDS_12_P SLOT5.LVDS_13_N SLOT5.LVDS_13_P SLOT5.LVDS_14_N SLOT5.LVDS_14_P SLOT5.LVDS_15_N SLOT5.LVDS_15_P SLOT5.LVDSr0_N SLOT5.LVDSr0_P SLOT5.LVDSr1_N SLOT5.LVDSr1_P SLOT5.LVDSr3_N SLOT5.LVDSr3_P SLOT6.LVDS_0_N SLOT6.LVDS_0_P SLOT6.LVDS_1_N SLOT6.LVDS_1_P SLOT6.LVDS_2_N SLOT6.LVDS_2_P SLOT6.LVDS_3_N SLOT6.LVDS_3_P SLOT6.LVDS_4_N SLOT6.LVDS_4_P SLOT6.LVDS_5_N SLOT6.LVDS_5_P SLOT6.LVDS_6_N SLOT6.LVDS_6_P SLOT6.LVDS_7_N SLOT6.LVDS_7_P SLOT6.LVDS_8_N SLOT6.LVDS_8_P SLOT6.LVDS_9_N SLOT6.LVDS_9_P SLOT6.LVDS_10_N SLOT6.LVDS_10_P SLOT6.LVDS_11_N SLOT6.LVDS_11_P SLOT6.LVDS_12_N SLOT6.LVDS_12_P SLOT6.LVDS_13_N SLOT6.LVDS_13_P SLOT6.LVDS_14_N SLOT6.LVDS_14_P SLOT6.LVDS_15_N SLOT6.LVDS_15_P SLOT6.LVDSr0_N SLOT6.LVDSr0_P SLOT6.LVDSr1_N SLOT6.LVDSr1_P SLOT6.LVDSr3_N SLOT6.LVDSr3_P SLOT7.LVDS_0_N SLOT7.LVDS_0_P SLOT7.LVDS_1_N SLOT7.LVDS_1_P SLOT7.LVDS_2_N SLOT7.LVDS_2_P SLOT7.LVDS_3_N SLOT7.LVDS_3_P SLOT7.LVDS_4_N SLOT7.LVDS_4_P SLOT7.LVDS_5_N SLOT7.LVDS_5_P SLOT7.LVDS_6_N SLOT7.LVDS_6_P SLOT7.LVDS_7_N SLOT7.LVDS_7_P SLOT7.LVDS_8_N SLOT7.LVDS_8_P SLOT7.LVDS_9_N SLOT7.LVDS_9_P SLOT7.LVDS_10_N SLOT7.LVDS_10_P SLOT7.LVDS_11_N SLOT7.LVDS_11_P SLOT7.LVDS_12_N SLOT7.LVDS_12_P SLOT7.LVDS_13_N SLOT7.LVDS_13_P SLOT7.LVDS_14_N SLOT7.LVDS_14_P SLOT7.LVDS_15_N SLOT7.LVDS_15_P SLOT7.LVDSr0_N SLOT7.LVDSr0_P SLOT7.LVDSr1_N SLOT7.LVDSr1_P SLOT7.LVDSr3_N SLOT7.LVDSr3_P SLOT7.LVDSr8_N SLOT7.LVDSr8_P SLOT7.LVDSr9_N SLOT7.LVDSr9_P SLOT7.LVDSr10_N SLOT7.LVDSr10_P SLOT7.LVDSr11_N SLOT7.LVDSr11_P SLOT7.LVDSr12_N SLOT7.LVDSr12_P SLOT7.LVDSr13_N SLOT7.LVDSr13_P SLOT7.LVDSr14_N SLOT7.LVDSr14_P SLOT7.LVDSr15_N SLOT7.LVDSr15_P SLOT8.LVDS_0_N SLOT8.LVDS_0_P SLOT8.LVDS_1_N SLOT8.LVDS_1_P SLOT8.LVDS_2_N SLOT8.LVDS_2_P SLOT8.LVDS_3_N SLOT8.LVDS_3_P SLOT8.LVDS_4_N SLOT8.LVDS_4_P SLOT8.LVDS_5_N SLOT8.LVDS_5_P SLOT8.LVDS_6_N SLOT8.LVDS_6_P SLOT8.LVDS_7_N SLOT8.LVDS_7_P SLOT8.LVDS_8_N SLOT8.LVDS_8_P SLOT8.LVDS_9_N SLOT8.LVDS_9_P SLOT8.LVDS_10_N SLOT8.LVDS_10_P SLOT8.LVDS_11_N SLOT8.LVDS_11_P SLOT8.LVDS_12_N SLOT8.LVDS_12_P SLOT8.LVDS_13_N SLOT8.LVDS_13_P SLOT8.LVDS_14_N SLOT8.LVDS_14_P SLOT8.LVDS_15_N SLOT8.LVDS_15_P SLOT8.LVDSr0_N SLOT8.LVDSr0_P SLOT8.LVDSr1_N SLOT8.LVDSr1_P SLOT8.LVDSr3_N SLOT8.LVDSr3_P SLOT8.LVDSr8_N SLOT8.LVDSr8_P SLOT8.LVDSr9_N SLOT8.LVDSr9_P SLOT8.LVDSr10_N SLOT8.LVDSr10_P SLOT8.LVDSr11_N SLOT8.LVDSr11_P SLOT8.LVDSr12_N SLOT8.LVDSr12_P SLOT8.LVDSr13_N SLOT8.LVDSr13_P SLOT8.LVDSr14_N SLOT8.LVDSr14_P SLOT8.LVDSr15_N SLOT8.LVDSr15_P
component class U_ST_SYS_Board_FPGA_SUP: C47 C48 C49 C50 C51 C53 C54 C55 C56 C58 C59 C60 C61 C62 C63 C64 C65 C66 C68 C69 C75 C76 C77 C86 C89 C90 C92 C93 C94 C95 C96 C97 C98 C99 C100 C101 C104 C105 C106 C110 C111 C112 C113 C114 C115 C116 C117 C118 C119 C120 C121 C122 C123 C124 C125 C126 C127
component class U_ST_SYS_Board_Clocking: C128 C129 C130 C131 C132 C133 C134 D16 IC17 OSC1 R205 R242 R243 R244 R245 R246 R283
component class U_ST_SYS_Board_Config: C44 C45 D11 IC14 IC15 J6 R223 R224 R225 R226 R227 R228 R239 R240 R241
component class STM_System_Board: B2 B3 B4 C10 C11 D12 FTG1 FTG2 FTG3 FTG4 FTG5 FTG6 J1 J2 J4 J5 J10 LD2 LD3 P1 R3 R4 R58 R76 R77 R78 R287 R288 R289 R290 ST2 W1
channel class LVDS_Driver: U_LVDS_Driver1 U_LVDS_Driver2 U_LVDS_Driver3 U_LVDS_Driver4 U_LVDS_Driver5 U_LVDS_Driver6
net class Z100R: SLOT1.LVDS_8_N SLOT1.LVDS_8_P SLOT1.LVDS_9_N SLOT1.LVDS_9_P SLOT1.LVDS_10_N SLOT1.LVDS_10_P SLOT1.LVDS_11_N SLOT1.LVDS_11_P SLOT2.LVDS_8_N SLOT2.LVDS_8_P SLOT2.LVDS_9_N SLOT2.LVDS_9_P SLOT2.LVDS_10_N SLOT2.LVDS_10_P SLOT2.LVDS_11_N SLOT2.LVDS_11_P SLOT3.LVDS_8_N SLOT3.LVDS_8_P SLOT3.LVDS_9_N SLOT3.LVDS_9_P SLOT3.LVDS_10_N SLOT3.LVDS_10_P SLOT3.LVDS_11_N SLOT3.LVDS_11_P SLOT4.LVDS_8_N SLOT4.LVDS_8_P SLOT4.LVDS_9_N SLOT4.LVDS_9_P SLOT4.LVDS_10_N SLOT4.LVDS_10_P SLOT4.LVDS_11_N SLOT4.LVDS_11_P SLOT5.LVDS_8_N SLOT5.LVDS_8_P SLOT5.LVDS_9_N SLOT5.LVDS_9_P SLOT5.LVDS_10_N SLOT5.LVDS_10_P SLOT5.LVDS_11_N SLOT5.LVDS_11_P SLOT6.LVDS_8_N SLOT6.LVDS_8_P SLOT6.LVDS_9_N SLOT6.LVDS_9_P SLOT6.LVDS_10_N SLOT6.LVDS_10_P SLOT6.LVDS_11_N SLOT6.LVDS_11_P
net class SHARED_BUS_[4..0]: SHARED_BUS_0 SHARED_BUS_1 SHARED_BUS_2 SHARED_BUS_3 SHARED_BUS_4
component class U_STM_System_Board_Supply: C22 C26 C27 C28 C29 C30 C32 C33 C34 C36 C39 C40 C42 C46 C141 C142 C143 D15 IC4 IC5 IC13 IC16 IC18 J3 J13 LD1 LD4 LD5 LD6 LD7 LD8 R194 R195 R196 R206 R207 R208 R209 R210 R211 R213 R214 R215 R216 R217 R218 R219 R230 R231 R232 R233 R234 R235 R236 R237 R238 R282 T1 T2 T3 TP4 TP5 TP6 TP7 TP8 TP9
component class U_LVDS_Driver4: C8D C9D C12D C13D C16D C17D C18D C19D C20D C135D C136D C137D C138D C139D C140D IC7D IC8D IC12D R166D R167D R168D R169D R170D R171D R172D R173D R174D R175D R178D R184D R190D R191D R192D R193D
component class U_LVDS_Driver3: C8C C9C C12C C13C C16C C17C C18C C19C C20C C135C C136C C137C C138C C139C C140C IC7C IC8C IC12C R166C R167C R168C R169C R170C R171C R172C R173C R174C R175C R178C R184C R190C R191C R192C R193C
component class U_LVDS_Driver6: C8F C9F C12F C13F C16F C17F C18F C19F C20F C135F C136F C137F C138F C139F C140F IC7F IC8F IC12F R166F R167F R168F R169F R170F R171F R172F R173F R174F R175F R178F R184F R190F R191F R192F R193F
component class U_LVDS_Driver5: C8E C9E C12E C13E C16E C17E C18E C19E C20E C135E C136E C137E C138E C139E C140E IC7E IC8E IC12E R166E R167E R168E R169E R170E R171E R172E R173E R174E R175E R178E R184E R190E R191E R192E R193E
component class U_LVDS_Driver2: C8B C9B C12B C13B C16B C17B C18B C19B C20B C135B C136B C137B C138B C139B C140B IC7B IC8B IC12B R166B R167B R168B R169B R170B R171B R172B R173B R174B R175B R178B R184B R190B R191B R192B R193B
component class U_LVDS_Driver1: C8A C9A C12A C13A C16A C17A C18A C19A C20A C135A C136A C137A C138A C139A C140A IC7A IC8A IC12A R166A R167A R168A R169A R170A R171A R172A R173A R174A R175A R178A R184A R190A R191A R192A R193A
component class U_Cpcis_connectors_P4_P5_P6: J11 J12 J31
component class U_Cpcis_connectors_P1_P2_P3: B28 B29 D2 D4 D5 D6 D7 D8 D9 J14 J29 J33 R125 R126 R127 R137 R138 R139 R140 R141 R142 R143 R204 R262 R263 R264 R265 R266 R267 R268 R269 R270 R271 R272 R300
component class USB: C C108 C109 D22 FB1 FB2 L9 R73 R75 SB1 SB2 SB3 SB4
component class RMII_Ethernet: C52 C79 C80 C81 C82 C83 C84 C85 C87 C88 C91 C102 C103 D3 IC11 J7 L7 Q2 R36 R37 R39 R40 R41 R42 R43 R44 R45 R46 R47 R49 R50 R55 R60 R98 R99 R135 R198 R199 R212 R220 R221 R222
component class CPU: C1 C14 C15 C21 C23 C24 C25 C31 C35 C37 C38 C41 C43 C57 C67 C70 C71 C72 C73 C74 C78 C107 D1 D28 IC1 IC9 IC10 J8 J15 JP2 L15 Q1 R1 R2 R12 R13 R14 R16 R30 R31 R33 R35 R95 R96 R97 R128 R131 R132 R136 R176 R177 R179 R180 R181 R182 R183 R185 R186 R187 R188 R189 R197 R284 R285 R286 TP1 TP2 TP3
component class U_ST_SYS_Board_FPGA: B1 D13 D14 IC6 R22 R23 R24 R25 R26 R27 R28 R29 R32 R34 R38 R48 R51 R52 R53 R54 R56 R57 R61 R62 R63 R64 R65 R66 R67 R68 R69 R70 R71 R72 R74 R79 R80 R81 R82 R83 R84 R85 R86 R87 R88 R89 R90 R91 R94 R100 R101 R102 R103 R104 R105 R106 R107 R108 R109 R110 R111 R112 R113 R114 R115 R116 R117 R118 R119 R120 R121 R122 R123 R124 R129 R130 R133 R134 R144 R145 R146 R147 R148 R149 R150 R151 R152 R153 R154 R155 R156 R157 R158 R159 R160 R161 R162 R163 R164 R165 R229 R247 R248 R249 R250 R251 R252 R253 R254 R255 R256 R257 R258 R259 R260 R261 R273 R274 R275 R276 R277 R278 R279 R280 R281
component class U_DIO_buffer: C2 C3 C4 C5 C6 C7 D10 IC2 IC3 R5 R6 R7 R8 R9 R10 R11 R15 R17 R18 R19 R20 R21 R59 R92 R93 R200 R201 R202 R203
differential pair SLOT7.LVDSr14: +SLOT7.LVDSr14_P -SLOT7.LVDSr14_N
differential pair SLOT7.LVDSr13: +SLOT7.LVDSr13_P -SLOT7.LVDSr13_N
differential pair SLOT7.LVDSr11: +SLOT7.LVDSr11_P -SLOT7.LVDSr11_N
differential pair SLOT7.LVDSr10: +SLOT7.LVDSr10_P -SLOT7.LVDSr10_N
differential pair SLOT7.LVDSr9: +SLOT7.LVDSr9_P -SLOT7.LVDSr9_N
differential pair SLOT7.LVDSr8: +SLOT7.LVDSr8_P -SLOT7.LVDSr8_N
differential pair SLOT4.LVDSr3: +SLOT4.LVDSr3_P -SLOT4.LVDSr3_N
differential pair SLOT3.LVDSr3: +SLOT3.LVDSr3_P -SLOT3.LVDSr3_N
differential pair SLOT6.LVDSr3: +SLOT5.LVDSr3_P -SLOT5.LVDSr3_N
differential pair SLOT8.LVDSr3: +SLOT6.LVDSr3_P -SLOT6.LVDSr3_N
differential pair SLOT7.LVDSr3: +SLOT7.LVDSr3_P -SLOT7.LVDSr3_N
differential pair SLOT7.LVDSr1: +SLOT5.LVDSr0_P -SLOT5.LVDSr0_N
differential pair SLOT5.LVDSr1: +SLOT5.LVDSr1_P -SLOT5.LVDSr1_N
differential pair SLOT4.LVDSr0: +SLOT6.LVDSr1_P -SLOT6.LVDSr1_N
differential pair SLOT3.LVDSr1: +SLOT7.LVDSr1_P -SLOT7.LVDSr1_N
differential pair SLOT2.LVDSr0: +SLOT2.LVDSr3_P -SLOT2.LVDSr3_N
differential pair SLOT8.LVDSr3: +SLOT8.LVDSr11_P -SLOT8.LVDSr11_N
differential pair SLOT7.LVDSr_14: +SLOT7.LVDSr0_P -SLOT7.LVDSr0_N
differential pair SLOT7.LVDSr_13: +SLOT8.LVDSr0_P -SLOT8.LVDSr0_N
differential pair SLOT7.LVDSr_11: +SLOT4.LVDSr1_P -SLOT4.LVDSr1_N
differential pair SLOT4.LVDSr_3: +SLOT8.LVDSr14_P -SLOT8.LVDSr14_N
differential pair SLOT3.LVDSr_3: +SLOT8.LVDSr8_P -SLOT8.LVDSr8_N
differential pair SLOT8.LVDSr15: +SLOT7.LVDSr15_P -SLOT7.LVDSr15_N
differential pair SLOT8.LVDSr13: +SLOT8.LVDSr13_P -SLOT8.LVDSr13_N
differential pair SLOT8.LVDSr12: +SLOT6.LVDSr0_P -SLOT6.LVDSr0_N
differential pair SLOT8.LVDSr11: +SLOT7.LVDSr12_P -SLOT7.LVDSr12_N
differential pair SLOT8.LVDSr10: +SLOT8.LVDSr10_P -SLOT8.LVDSr10_N
differential pair SLOT8.LVDSr8: +SLOT8.LVDSr12_P -SLOT8.LVDSr12_N
differential pair SLOT8.LVDS_15: +SLOT8.LVDS_15_P -SLOT8.LVDS_15_N
differential pair SLOT8.LVDS_14: +SLOT8.LVDS_14_P -SLOT8.LVDS_14_N
differential pair SLOT8.LVDS_13: +SLOT8.LVDS_13_P -SLOT8.LVDS_13_N
differential pair SLOT8.LVDS_12: +SLOT8.LVDS_12_P -SLOT8.LVDS_12_N
differential pair SLOT8.LVDS_11: +SLOT8.LVDS_11_P -SLOT8.LVDS_11_N
differential pair SLOT8.LVDS_10: +SLOT8.LVDS_10_P -SLOT8.LVDS_10_N
differential pair SLOT8.LVDS_9: +SLOT8.LVDS_9_P -SLOT8.LVDS_9_N
differential pair SLOT8.LVDS_8: +SLOT8.LVDS_8_P -SLOT8.LVDS_8_N
differential pair SLOT7.LVDSr15: +SLOT8.LVDSr15_P -SLOT8.LVDSr15_N
differential pair SLOT7.LVDSr0: +SLOT3.LVDSr0_P -SLOT3.LVDSr0_N
differential pair SLOT7.LVDS_15: +SLOT7.LVDS_15_P -SLOT7.LVDS_15_N
differential pair SLOT7.LVDS_14: +SLOT7.LVDS_14_P -SLOT7.LVDS_14_N
differential pair SLOT7.LVDS_13: +SLOT7.LVDS_13_P -SLOT7.LVDS_13_N
differential pair SLOT7.LVDS_12: +SLOT7.LVDS_12_P -SLOT7.LVDS_12_N
differential pair SLOT7.LVDS_11: +SLOT7.LVDS_11_P -SLOT7.LVDS_11_N
differential pair SLOT7.LVDS_10: +SLOT7.LVDS_10_P -SLOT7.LVDS_10_N
differential pair SLOT7.LVDS_9: +SLOT7.LVDS_9_P -SLOT7.LVDS_9_N
differential pair SLOT7.LVDS_8: +SLOT7.LVDS_8_P -SLOT7.LVDS_8_N
differential pair SLOT6.LVDSr1: +SLOT8.LVDSr9_P -SLOT8.LVDSr9_N
differential pair SLOT6.LVDS_15: +SLOT6.LVDS_15_P -SLOT6.LVDS_15_N
differential pair SLOT6.LVDS_14: +SLOT6.LVDS_14_P -SLOT6.LVDS_14_N
differential pair SLOT6.LVDS_13: +SLOT6.LVDS_13_P -SLOT6.LVDS_13_N
differential pair SLOT6.LVDS_12: +SLOT6.LVDS_12_P -SLOT6.LVDS_12_N
differential pair SLOT6.LVDS_11: +SLOT6.LVDS_11_P -SLOT6.LVDS_11_N
differential pair SLOT6.LVDS_10: +SLOT6.LVDS_10_P -SLOT6.LVDS_10_N
differential pair SLOT6.LVDS_9: +SLOT6.LVDS_9_P -SLOT6.LVDS_9_N
differential pair SLOT6.LVDS_8: +SLOT6.LVDS_8_P -SLOT6.LVDS_8_N
differential pair SLOT5.LVDSr3: +SLOT8.LVDSr3_P -SLOT8.LVDSr3_N
differential pair SLOT5.LVDSr0: +SLOT8.LVDSr1_P -SLOT8.LVDSr1_N
differential pair SLOT5.LVDS_15: +SLOT5.LVDS_15_P -SLOT5.LVDS_15_N
differential pair SLOT5.LVDS_14: +SLOT5.LVDS_14_P -SLOT5.LVDS_14_N
differential pair SLOT5.LVDS_13: +SLOT5.LVDS_13_P -SLOT5.LVDS_13_N
differential pair SLOT5.LVDS_12: +SLOT5.LVDS_12_P -SLOT5.LVDS_12_N
differential pair SLOT5.LVDS_11: +SLOT5.LVDS_11_P -SLOT5.LVDS_11_N
differential pair SLOT5.LVDS_10: +SLOT5.LVDS_10_P -SLOT5.LVDS_10_N
differential pair SLOT5.LVDS_9: +SLOT5.LVDS_9_P -SLOT5.LVDS_9_N
differential pair SLOT5.LVDS_8: +SLOT5.LVDS_8_P -SLOT5.LVDS_8_N
differential pair SLOT3.LVDSr0: +SLOT4.LVDSr0_P -SLOT4.LVDSr0_N
differential pair SLOT2.LVDSr3: +SLOT1.LVDSr1_P -SLOT1.LVDSr1_N
differential pair SLOT2.LVDS_15: +SLOT2.LVDS_15_P -SLOT2.LVDS_15_N
differential pair SLOT2.LVDS_14: +SLOT2.LVDS_14_P -SLOT2.LVDS_14_N
differential pair SLOT2.LVDS_13: +SLOT2.LVDS_13_P -SLOT2.LVDS_13_N
differential pair SLOT2.LVDS_12: +SLOT2.LVDS_12_P -SLOT2.LVDS_12_N
differential pair SLOT2.LVDS_11: +SLOT2.LVDS_11_P -SLOT2.LVDS_11_N
differential pair SLOT2.LVDS_10: +SLOT2.LVDS_10_P -SLOT2.LVDS_10_N
differential pair SLOT2.LVDS_9: +SLOT2.LVDS_9_P -SLOT2.LVDS_9_N
differential pair SLOT2.LVDS_8: +SLOT2.LVDS_8_P -SLOT2.LVDS_8_N
differential pair SLOT1.LVDS_15: +SLOT1.LVDS_15_P -SLOT1.LVDS_15_N
differential pair SLOT1.LVDS_14: +SLOT1.LVDS_14_P -SLOT1.LVDS_14_N
differential pair SLOT1.LVDS_13: +SLOT1.LVDS_13_P -SLOT1.LVDS_13_N
differential pair SLOT1.LVDS_12: +SLOT1.LVDS_12_P -SLOT1.LVDS_12_N
differential pair SLOT1.LVDS_11: +SLOT1.LVDS_11_P -SLOT1.LVDS_11_N
differential pair SLOT1.LVDS_10: +SLOT1.LVDS_10_P -SLOT1.LVDS_10_N
differential pair SLOT1.LVDS_9: +SLOT1.LVDS_9_P -SLOT1.LVDS_9_N
differential pair SLOT1.LVDS_8: +SLOT1.LVDS_8_P -SLOT1.LVDS_8_N
differential pair SLOT1.LVDSr3: +SLOT2.LVDSr0_P -SLOT2.LVDSr0_N
differential pair SLOT1.LVDSr0: +SLOT1.LVDSr0_P -SLOT1.LVDSr0_N
differential pair SLOT1.LVDSr1: +SLOT1.LVDSr3_P -SLOT1.LVDSr3_N
differential pair SLOT4.LVDSr1: +SLOT3.LVDSr1_P -SLOT3.LVDSr1_N
differential pair SLOT2.LVDSr1: +SLOT2.LVDSr1_P -SLOT2.LVDSr1_N
differential pair SLOT4.LVDS_15: +SLOT4.LVDS_15_P -SLOT4.LVDS_15_N
differential pair SLOT4.LVDS_14: +SLOT4.LVDS_14_P -SLOT4.LVDS_14_N
differential pair SLOT4.LVDS_13: +SLOT4.LVDS_13_P -SLOT4.LVDS_13_N
differential pair SLOT4.LVDS_12: +SLOT4.LVDS_12_P -SLOT4.LVDS_12_N
differential pair SLOT4.LVDS_11: +SLOT4.LVDS_11_P -SLOT4.LVDS_11_N
differential pair SLOT4.LVDS_10: +SLOT4.LVDS_10_P -SLOT4.LVDS_10_N
differential pair SLOT4.LVDS_9: +SLOT4.LVDS_9_P -SLOT4.LVDS_9_N
differential pair SLOT4.LVDS_8: +SLOT4.LVDS_8_P -SLOT4.LVDS_8_N
differential pair SLOT3.LVDS_15: +SLOT3.LVDS_15_P -SLOT3.LVDS_15_N
differential pair SLOT3.LVDS_14: +SLOT3.LVDS_14_P -SLOT3.LVDS_14_N
differential pair SLOT3.LVDS_13: +SLOT3.LVDS_13_P -SLOT3.LVDS_13_N
differential pair SLOT3.LVDS_12: +SLOT3.LVDS_12_P -SLOT3.LVDS_12_N
differential pair SLOT3.LVDS_11: +SLOT3.LVDS_11_P -SLOT3.LVDS_11_N
differential pair SLOT3.LVDS_10: +SLOT3.LVDS_10_P -SLOT3.LVDS_10_N
differential pair SLOT3.LVDS_9: +SLOT3.LVDS_9_P -SLOT3.LVDS_9_N
differential pair SLOT3.LVDS_8: +SLOT3.LVDS_8_P -SLOT3.LVDS_8_N
differential pair SLOT7.LVDS_7: +SLOT7.LVDS_7_P -SLOT7.LVDS_7_N
differential pair SLOT7.LVDS_6: +SLOT7.LVDS_6_P -SLOT7.LVDS_6_N
differential pair SLOT7.LVDS_5: +SLOT7.LVDS_5_P -SLOT7.LVDS_5_N
differential pair SLOT7.LVDS_4: +SLOT7.LVDS_4_P -SLOT7.LVDS_4_N
differential pair SLOT7.LVDS_3: +SLOT7.LVDS_3_P -SLOT7.LVDS_3_N
differential pair SLOT7.LVDS_2: +SLOT7.LVDS_2_P -SLOT7.LVDS_2_N
differential pair SLOT7.LVDS_1: +SLOT7.LVDS_1_P -SLOT7.LVDS_1_N
differential pair SLOT7.LVDS_0: +SLOT7.LVDS_0_P -SLOT7.LVDS_0_N
differential pair SLOT8.LVDS_7: +SLOT8.LVDS_7_P -SLOT8.LVDS_7_N
differential pair SLOT8.LVDS_6: +SLOT8.LVDS_6_P -SLOT8.LVDS_6_N
differential pair SLOT8.LVDS_5: +SLOT8.LVDS_5_P -SLOT8.LVDS_5_N
differential pair SLOT8.LVDS_4: +SLOT8.LVDS_4_P -SLOT8.LVDS_4_N
differential pair SLOT8.LVDS_3: +SLOT8.LVDS_3_P -SLOT8.LVDS_3_N
differential pair SLOT8.LVDS_2: +SLOT8.LVDS_2_P -SLOT8.LVDS_2_N
differential pair SLOT8.LVDS_1: +SLOT8.LVDS_1_P -SLOT8.LVDS_1_N
differential pair SLOT8.LVDS_0: +SLOT8.LVDS_0_P -SLOT8.LVDS_0_N
differential pair SLOT6.LVDS_7: +SLOT6.LVDS_7_P -SLOT6.LVDS_7_N
differential pair SLOT6.LVDS_6: +SLOT6.LVDS_6_P -SLOT6.LVDS_6_N
differential pair SLOT6.LVDS_5: +SLOT6.LVDS_5_P -SLOT6.LVDS_5_N
differential pair SLOT6.LVDS_4: +SLOT6.LVDS_4_P -SLOT6.LVDS_4_N
differential pair SLOT6.LVDS_3: +SLOT6.LVDS_3_P -SLOT6.LVDS_3_N
differential pair SLOT6.LVDS_2: +SLOT6.LVDS_2_P -SLOT6.LVDS_2_N
differential pair SLOT6.LVDS_1: +SLOT6.LVDS_1_P -SLOT6.LVDS_1_N
differential pair SLOT6.LVDS_0: +SLOT6.LVDS_0_P -SLOT6.LVDS_0_N
differential pair SLOT5.LVDS_7: +SLOT5.LVDS_7_P -SLOT5.LVDS_7_N
differential pair SLOT5.LVDS_6: +SLOT5.LVDS_6_P -SLOT5.LVDS_6_N
differential pair SLOT5.LVDS_5: +SLOT5.LVDS_5_P -SLOT5.LVDS_5_N
differential pair SLOT5.LVDS_4: +SLOT5.LVDS_4_P -SLOT5.LVDS_4_N
differential pair SLOT5.LVDS_3: +SLOT5.LVDS_3_P -SLOT5.LVDS_3_N
differential pair SLOT5.LVDS_2: +SLOT5.LVDS_2_P -SLOT5.LVDS_2_N
differential pair SLOT5.LVDS_1: +SLOT5.LVDS_1_P -SLOT5.LVDS_1_N
differential pair SLOT5.LVDS_0: +SLOT5.LVDS_0_P -SLOT5.LVDS_0_N
differential pair SLOT4.LVDS_7: +SLOT4.LVDS_7_P -SLOT4.LVDS_7_N
differential pair SLOT4.LVDS_6: +SLOT4.LVDS_6_P -SLOT4.LVDS_6_N
differential pair SLOT4.LVDS_5: +SLOT4.LVDS_5_P -SLOT4.LVDS_5_N
differential pair SLOT4.LVDS_4: +SLOT4.LVDS_4_P -SLOT4.LVDS_4_N
differential pair SLOT4.LVDS_3: +SLOT4.LVDS_3_P -SLOT4.LVDS_3_N
differential pair SLOT4.LVDS_2: +SLOT4.LVDS_2_P -SLOT4.LVDS_2_N
differential pair SLOT4.LVDS_1: +SLOT4.LVDS_1_P -SLOT4.LVDS_1_N
differential pair SLOT4.LVDS_0: +SLOT4.LVDS_0_P -SLOT4.LVDS_0_N
differential pair SLOT3.LVDS_7: +SLOT3.LVDS_7_P -SLOT3.LVDS_7_N
differential pair SLOT3.LVDS_6: +SLOT3.LVDS_6_P -SLOT3.LVDS_6_N
differential pair SLOT3.LVDS_5: +SLOT3.LVDS_5_P -SLOT3.LVDS_5_N
differential pair SLOT3.LVDS_4: +SLOT3.LVDS_4_P -SLOT3.LVDS_4_N
differential pair SLOT3.LVDS_3: +SLOT3.LVDS_3_P -SLOT3.LVDS_3_N
differential pair SLOT3.LVDS_2: +SLOT3.LVDS_2_P -SLOT3.LVDS_2_N
differential pair SLOT3.LVDS_1: +SLOT3.LVDS_1_P -SLOT3.LVDS_1_N
differential pair SLOT3.LVDS_0: +SLOT3.LVDS_0_P -SLOT3.LVDS_0_N
differential pair SLOT2.LVDS_7: +SLOT2.LVDS_7_P -SLOT2.LVDS_7_N
differential pair SLOT2.LVDS_6: +SLOT2.LVDS_6_P -SLOT2.LVDS_6_N
differential pair SLOT2.LVDS_5: +SLOT2.LVDS_5_P -SLOT2.LVDS_5_N
differential pair SLOT2.LVDS_4: +SLOT2.LVDS_4_P -SLOT2.LVDS_4_N
differential pair SLOT2.LVDS_3: +SLOT2.LVDS_3_P -SLOT2.LVDS_3_N
differential pair SLOT2.LVDS_2: +SLOT2.LVDS_2_P -SLOT2.LVDS_2_N
differential pair SLOT2.LVDS_1: +SLOT2.LVDS_1_P -SLOT2.LVDS_1_N
differential pair SLOT2.LVDS_0: +SLOT2.LVDS_0_P -SLOT2.LVDS_0_N
differential pair SLOT1.LVDS_7: +SLOT1.LVDS_7_P -SLOT1.LVDS_7_N
differential pair SLOT1.LVDS_6: +SLOT1.LVDS_6_P -SLOT1.LVDS_6_N
differential pair SLOT1.LVDS_5: +SLOT1.LVDS_5_P -SLOT1.LVDS_5_N
differential pair SLOT1.LVDS_4: +SLOT1.LVDS_4_P -SLOT1.LVDS_4_N
differential pair SLOT1.LVDS_3: +SLOT1.LVDS_3_P -SLOT1.LVDS_3_N
differential pair SLOT1.LVDS_2: +SLOT1.LVDS_2_P -SLOT1.LVDS_2_N
differential pair SLOT1.LVDS_1: +SLOT1.LVDS_1_P -SLOT1.LVDS_1_N
differential pair SLOT1.LVDS_0: +SLOT1.LVDS_0_P -SLOT1.LVDS_0_N
differential pair 8_PE_CLK: +8_PE_CLK_P -8_PE_CLK_N
differential pair 7_PE_CLK: +7_PE_CLK_P -7_PE_CLK_N
differential pair 6_PE_CLK: +6_PE_CLK_P -6_PE_CLK_N
differential pair 5_PE_CLK: +5_PE_CLK_P -5_PE_CLK_N
differential pair 4_PE_CLK: +4_PE_CLK_P -4_PE_CLK_N
differential pair 3_PE_CLK: +3_PE_CLK_P -3_PE_CLK_N
differential pair 2_PE_CLK: +2_PE_CLK_P -2_PE_CLK_N
differential pair 1_PE_CLK: +1_PE_CLK_P -1_PE_CLK_N
differential pair TD: +TD_P -TD_N
differential pair RD: +RD_P -RD_N
differential pair USBJ: +USBJ_P -USBJ_N
differential pair USB: +USB_P -USB_N
differential pair PHY_TD: +PHY_TD_P -PHY_TD_N
differential pair PHY_RD: +PHY_RD_P -PHY_RD_N

## Components (designator, comment, footprint, x,y, rotation, side; value= is the part's Value field where it differs from the comment)
B1 "SMD Pad" C75 58.293,57.928 r0 top
B2 "Plated Hole" c170h100 20,31 r0 top
B3 "Plated Hole" c170h100 141.575,24.225 r0 top
B4 "Plated Hole" c170h100 166.975,83.2 r0 top
B28 "SMD Pad" C100 184.861,4.168 r90 top
B29 "SMD Pad" C100 184.861,6.318 r90 top
C1 "100nF" CAPC1005X55N 35.45,40.725 r90 top
C2 "Undefined" CAPC1608X90N 11.049,63.881 r180 top
C3 "Undefined" CAPC1608X90N 9.779,44.323 r180 top
C4 "Undefined" CAPC1608X90N 13.843,44.196 r180 top
C5 "100nF" CAPC1005X55N 10.574,36.601 r0 top
C6 "100nF" CAPC1005X55N 16.51,49.149 r90 top
C7 "Undefined" CAPC1608X90N 14.986,63.881 r180 top
C8A "100nF" CAPC1005X55N 110.95,4.531 r180 top (schematic designator C8)
C8B "100nF" CAPC1005X55N 110.95,16.031 r180 top (schematic designator C8)
C8C "100nF" CAPC1005X55N 110.819,52.571 r180 top (schematic designator C8)
C8D "100nF" CAPC1005X55N 110.754,64.519 r180 top (schematic designator C8)
C8E "100nF" CAPC1005X55N 110.754,75.904 r180 top (schematic designator C8)
C8F "100nF" CAPC1005X55N 110.754,87.404 r180 top (schematic designator C8)
C9A "100nF" CAPC1005X55N 128.64,13.481 r180 top (schematic designator C9)
C9B "100nF" CAPC1005X55N 128.64,24.981 r180 top (schematic designator C9)
C9C "100nF" CAPC1005X55N 128.509,61.521 r180 top (schematic designator C9)
C9D "100nF" CAPC1005X55N 128.444,73.469 r180 top (schematic designator C9)
C9E "100nF" CAPC1005X55N 128.444,84.854 r180 top (schematic designator C9)
C9F "100nF" CAPC1005X55N 128.444,96.354 r180 top (schematic designator C9)
C10 "Undefined" CAPC2012X135N 10.897,92.608 r0 top
C11 "Undefined" CAPC2012X135N 10.5,4.5 r0 top
C12A "100nF" CAPC1005X55N 131.673,13.465 r0 top (schematic designator C12)
C12B "100nF" CAPC1005X55N 131.673,24.965 r0 top (schematic designator C12)
C12C "100nF" CAPC1005X55N 131.542,61.505 r0 top (schematic designator C12)
C12D "100nF" CAPC1005X55N 131.477,73.453 r0 top (schematic designator C12)
C12E "100nF" CAPC1005X55N 131.477,84.838 r0 top (schematic designator C12)
C12F "100nF" CAPC1005X55N 131.477,96.338 r0 top (schematic designator C12)
C13A "100nF" CAPC1005X55N 131.723,4.146 r0 top (schematic designator C13)
C13B "100nF" CAPC1005X55N 131.723,15.646 r0 top (schematic designator C13)
C13C "100nF" CAPC1005X55N 131.592,52.186 r0 top (schematic designator C13)
C13D "100nF" CAPC1005X55N 131.527,64.134 r0 top (schematic designator C13)
C13E "100nF" CAPC1005X55N 131.527,75.519 r0 top (schematic designator C13)
C13F "100nF" CAPC1005X55N 131.527,87.019 r0 top (schematic designator C13)
C14 "2.2uF" CAPC1608X90N 53.675,70.5 r180 top
C15 "100nF" CAPC1005X55N 50.625,71.95 r0 top
C16A "100nF" CAPC1005X55N 125.975,8.906 r0 top (schematic designator C16)
C16B "100nF" CAPC1005X55N 125.975,20.406 r0 top (schematic designator C16)
C16C "100nF" CAPC1005X55N 125.844,56.946 r0 top (schematic designator C16)
C16D "100nF" CAPC1005X55N 125.779,68.894 r0 top (schematic designator C16)
C16E "100nF" CAPC1005X55N 125.779,80.279 r0 top (schematic designator C16)
C16F "100nF" CAPC1005X55N 125.779,91.779 r0 top (schematic designator C16)
C17A "100nF" CAPC1005X55N 113.14,9.056 r0 top (schematic designator C17)
C17B "100nF" CAPC1005X55N 113.14,20.556 r0 top (schematic designator C17)
C17C "100nF" CAPC1005X55N 113.009,57.096 r0 top (schematic designator C17)
C17D "100nF" CAPC1005X55N 112.944,69.044 r0 top (schematic designator C17)
C17E "100nF" CAPC1005X55N 112.944,80.429 r0 top (schematic designator C17)
C17F "100nF" CAPC1005X55N 112.944,91.929 r0 top (schematic designator C17)
C18A "100nF" CAPC1005X55N 118.909,4.141 r0 top (schematic designator C18)
C18B "100nF" CAPC1005X55N 118.909,15.641 r0 top (schematic designator C18)
C18C "100nF" CAPC1005X55N 118.778,52.18 r0 top (schematic designator C18)
C18D "100nF" CAPC1005X55N 118.713,64.129 r0 top (schematic designator C18)
C18E "100nF" CAPC1005X55N 118.713,75.513 r0 top (schematic designator C18)
C18F "100nF" CAPC1005X55N 118.713,87.013 r0 top (schematic designator C18)
C19A "100nF" CAPC1005X55N 118.877,13.483 r0 top (schematic designator C19)
C19B "100nF" CAPC1005X55N 118.877,24.983 r0 top (schematic designator C19)
C19C "100nF" CAPC1005X55N 118.746,61.523 r0 top (schematic designator C19)
C19D "100nF" CAPC1005X55N 118.681,73.471 r0 top (schematic designator C19)
C19E "100nF" CAPC1005X55N 118.681,84.856 r0 top (schematic designator C19)
C19F "100nF" CAPC1005X55N 118.681,96.356 r0 top (schematic designator C19)
C20A "100nF" CAPC1005X55N 115.899,13.49 r180 top (schematic designator C20)
C20B "100nF" CAPC1005X55N 115.899,24.99 r180 top (schematic designator C20)
C20C "100nF" CAPC1005X55N 115.768,61.529 r180 top (schematic designator C20)
C20D "100nF" CAPC1005X55N 115.703,73.478 r180 top (schematic designator C20)
C20E "100nF" CAPC1005X55N 115.703,84.862 r180 top (schematic designator C20)
C20F "100nF" CAPC1005X55N 115.703,96.362 r180 top (schematic designator C20)
C21 "22pF" CAPC1005X55N 52.089,64.373 r90 top
C22 "22uF" CAPC2012X135N 41.208,38.786 r270 top
C23 "22pF" CAPC1005X55N 52.114,67.085 r270 top
C24 "2.2uF" CAPC1608X90N 22.324,56.453 r180 top
C25 "2.2uF" CAPC1608X90N 28.601,76.696 r180 top
C26 "22uF" CAPC2012X135N 39.303,38.786 r270 top
C27 "22uF" CAPC2012X135N 40.445,43.485 r0 top
C28 "22uF" CAPC2012X135N 40.573,31.195 r0 top
C29 "22uF" CAPC2012X135N 40.445,41.481 r0 top
C30 "22uF" CAPC2012X135N 40.573,33.227 r0 top
C31 "100nF" CAPC1005X55N 50.625,71 r0 top
C32 "22uF" CAPC2012X135N 53.273,42.305 r270 top
C33 "22uF" CAPC2012X135N 51.241,42.305 r270 top
C34 "22uF" CAPC2012X135N 51.368,34.281 r90 top
C35 "100nF" CAPC1005X55N 33.935,76.945 r90 top
C36 "22uF" CAPC2012X135N 53.273,34.281 r90 top
C37 "100nF" CAPC1005X55N 38.935,76.945 r90 top
C38 "100nF" CAPC1005X55N 50.375,63.2 r0 top
C39 "1uF" CAPC1005X55N 37.719,41.021 r270 top
C40 "100nF" CAPC1005X55N 55.753,48.006 r0 top
C41 "100nF" CAPC1005X55N 50.625,69.575 r0 top
C42 "100nF" CAPC1005X55N 87.249,87.503 r0 top
C43 "100nF" CAPC1005X55N 50.435,57.996 r0 top
C44 "100nF" CAPC1005X55N 22.709,43.844 r0 top
C45 "100nF" CAPC1005X55N 58.65,72.3 r270 top
C46 "100nF" CAPC1005X55N 13.335,74.803 r270 top
C47 "100nF" CAPC1005X55N 81.515,45.984 r90 bottom
C48 "100nF" CAPC1005X55N 73,39.65 r180 bottom
C49 "10nF" CAPC0603X33N 80.309,48.748 r0 bottom
C50 "10nF" CAPC0603X33N 80.301,46.371 r0 bottom
C51 "10nF" CAPC0603X33N 71.325,39.775 r0 bottom
C52 "10uF" CAPMP3216X180N 29.394,22.256 r90 top
C53 "100nF" CAPC1005X55N 81.415,40.684 r90 bottom
C54 "100nF" CAPC1005X55N 81.515,48.184 r270 bottom
C55 "10nF" CAPC0603X33N 80.301,43.176 r0 bottom
C56 "10nF" CAPC0603X33N 80.35,41.525 r0 bottom
C57 "100nF" CAPC1005X55N 24.959,55.496 r180 top
C58 "10nF" CAPC0603X33N 80.325,44.8 r0 bottom
C59 "10nF" CAPC0603X33N 80.292,42.271 r0 bottom
C60 "10nF" CAPC0603X33N 80.292,47.841 r0 bottom
C61 "100nF" CAPC1005X55N 77.925,39.524 r180 bottom
C62 "100nF" CAPC1005X55N 81.75,42.8 r270 bottom
C63 "10nF" CAPC0603X33N 73.95,40.75 r270 bottom
C64 "10nF" CAPC0603X33N 77.131,40.732 r270 bottom
C65 "10nF" CAPC0603X33N 80.325,39.787 r180 bottom
C66 "10nF" CAPC0603X33N 78.7,40.775 r270 bottom
C67 "100nF" CAPC1005X55N 28.392,83.291 r180 top
C68 "10nF" CAPC0603X33N 74.74,40.744 r270 bottom
C69 "100nF" CAPC1005X55N 75.925,49.775 r90 bottom
C70 "100nF" CAPC1005X55N 34.933,51.619 r270 top
C71 "100nF" CAPC1005X55N 45.405,76.895 r90 top
C72 "100nF" CAPC1005X55N 47.05,51.414 r270 top
C73 "100nF" CAPC1005X55N 24.959,67.496 r180 top
C74 "100nF" CAPC1005X55N 24.959,62.043 r180 top
C75 "100nF" CAPC1005X55N 70.425,46.625 r90 bottom
C76 "10nF" CAPC0603X33N 73.108,40.731 r270 bottom
C77 "10nF" CAPC0603X33N 70.736,40.744 r270 bottom
C78 "10uF" CAPC2012X95N 51.054,76.2 r0 top
C79 "100nF" CAPC1005X55N 29.197,18.501 r90 top
C80 "100nF" CAPC1005X55N 27.409,11.865 r180 top
C81 "100nF" CAPC1005X55N 32.366,12.841 r90 top
C82 "30pF" CAPC1005X55N 30.909,11.115 r0 top
C83 "1nF" CAPC1005X55N 35.145,13.472 r180 top
C84 "100nF" CAPC1005X55N 37.149,16.311 r180 top
C85 "100nF" CAPC1005X55N 30.233,18.501 r270 top
C86 "10nF" CAPC0603X33N 71.512,47.995 r0 bottom
C87 "1uF" CAPC1608X87N 35.909,12.161 r180 top
C88 "100nF" CAPC1005X55N 31.383,12.837 r90 top
C89 "100uF" CAPMP3528X210N 61.715,51.184 r90 top
C90 "100nF" CAPC1005X55N 75.864,40.708 r270 bottom
C91 "30pF" CAPC1005X55N 38.909,11.115 r180 top
C92 "10nF" CAPC0603X33N 73.947,49.58 r90 bottom
C93 "10nF" CAPC0603X33N 74.761,49.574 r90 bottom
C94 "10nF" CAPC0603X33N 77.105,49.58 r90 bottom
C95 "10nF" CAPC0603X33N 70.77,49.567 r90 bottom
C96 "100nF" CAPC1005X55N 79.415,50.684 r180 bottom
C97 "10nF" CAPC0603X33N 72.32,49.535 r90 bottom
C98 "10nF" CAPC0603X33N 73.133,49.58 r90 bottom
C99 "10nF" CAPC0603X33N 78.746,49.612 r90 bottom
C100 "10nF" CAPC0603X33N 77.925,49.587 r90 bottom
C101 "100uF" CAPMP3528X210N 61.715,38.584 r270 top
C102 "Undefined" CAPC2012X135N 14.224,27.686 r0 top
C103 "Undefined" CAPC2012X135N 10.5,6.491 r0 top
C104 "100nF" CAPC1005X55N 76.325,42.527 r270 bottom
C105 "100nF" CAPC1005X55N 78.631,45.199 r0 bottom
C106 "100uF" CAPMP3528X210N 61.715,44.784 r90 top
C107 "2.2uF" CAPC1608X90N 51.225,73.175 r180 top
C108 "100nF" CAPC1005X55N 22.537,7.112 r180 top
C109 "100nF" CAPC1005X55N 24.257,9.779 r180 top
C110 "10nF" CAPC0603X33N 78.718,43.176 r0 bottom
C111 "10nF" CAPC0603X33N 78.709,47.186 r0 bottom
C112 "10nF" CAPC0603X33N 78.746,46.371 r0 bottom
C113 "10nF" CAPC0603X33N 78.715,43.983 r0 bottom
C114 "10nF" CAPC0603X33N 73.108,42.388 r0 bottom
C115 "10nF" CAPC0603X33N 75.505,47.979 r90 bottom
C116 "10nF" CAPC0603X33N 77.105,47.979 r90 bottom
C117 "10nF" CAPC0603X33N 73.108,47.979 r0 bottom
C118 "100nF" CAPC1005X55N 76.306,47.992 r90 bottom
C119 "100nF" CAPC1005X55N 73.108,45.199 r0 bottom
C120 "10nF" CAPC0603X33N 73.098,46.371 r0 bottom
C121 "10nF" CAPC0603X33N 73.098,43.986 r0 bottom
C122 "10nF" CAPC0603X33N 77.925,42.388 r270 bottom
C123 "10nF" CAPC0603X33N 75.515,42.388 r270 bottom
C124 "10nF" CAPC0603X33N 77.105,42.388 r270 bottom
C125 "10nF" CAPC0603X33N 77.925,47.979 r90 bottom
C126 "10nF" CAPC0603X33N 74.735,47.979 r90 bottom
C127 "10nF" CAPC0603X33N 74.735,42.358 r270 bottom
C128 "10nF" CAPC0603X33N 183.75,76.439 r180 top
C129 "10nF" CAPC0603X33N 188.35,80.314 r270 top
C130 "10nF" CAPC0603X33N 187.375,80.314 r270 top
C131 "10nF" CAPC0603X33N 183.75,75.494 r0 top
C132 "10nF" CAPC0603X33N 186.65,71.839 r0 top
C133 "10nF" CAPC0603X33N 184.7,77.289 r0 top
C134 "100nF" CAPC1005X55N 192.3,77.539 r270 top
C135A "100nF" CAPC1005X55N 115.8,4.141 r180 top (schematic designator C135)
C135B "100nF" CAPC1005X55N 115.8,15.641 r180 top (schematic designator C135)
C135C "100nF" CAPC1005X55N 115.669,52.18 r180 top (schematic designator C135)
C135D "100nF" CAPC1005X55N 115.604,64.129 r180 top (schematic designator C135)
C135E "100nF" CAPC1005X55N 115.604,75.513 r180 top (schematic designator C135)
C135F "100nF" CAPC1005X55N 115.604,87.013 r180 top (schematic designator C135)
C136A "100nF" CAPC1005X55N 123.028,5.106 r90 top (schematic designator C136)
C136B "100nF" CAPC1005X55N 123.028,16.606 r90 top (schematic designator C136)
C136C "100nF" CAPC1005X55N 122.897,53.146 r90 top (schematic designator C136)
C136D "100nF" CAPC1005X55N 122.832,65.094 r90 top (schematic designator C136)
C136E "100nF" CAPC1005X55N 122.832,76.479 r90 top (schematic designator C136)
C136F "100nF" CAPC1005X55N 122.832,87.979 r90 top (schematic designator C136)
C137A "100nF" CAPC1005X55N 123.028,12.256 r270 top (schematic designator C137)
C137B "100nF" CAPC1005X55N 123.028,23.756 r270 top (schematic designator C137)
C137C "100nF" CAPC1005X55N 122.897,60.296 r270 top (schematic designator C137)
C137D "100nF" CAPC1005X55N 122.832,72.244 r270 top (schematic designator C137)
C137E "100nF" CAPC1005X55N 122.832,83.629 r270 top (schematic designator C137)
C137F "100nF" CAPC1005X55N 122.832,95.129 r270 top (schematic designator C137)
C138A "100nF" CAPC1005X55N 135.857,12.256 r270 top (schematic designator C138)
C138B "100nF" CAPC1005X55N 135.857,23.756 r270 top (schematic designator C138)
C138C "100nF" CAPC1005X55N 135.726,60.296 r270 top (schematic designator C138)
C138D "100nF" CAPC1005X55N 135.661,72.244 r270 top (schematic designator C138)
C138E "100nF" CAPC1005X55N 135.661,83.629 r270 top (schematic designator C138)
C138F "100nF" CAPC1005X55N 135.661,95.129 r270 top (schematic designator C138)
C139A "100nF" CAPC1005X55N 135.945,5.356 r90 top (schematic designator C139)
C139B "100nF" CAPC1005X55N 135.945,16.856 r90 top (schematic designator C139)
C139C "100nF" CAPC1005X55N 135.814,53.396 r90 top (schematic designator C139)
C139D "100nF" CAPC1005X55N 135.749,65.344 r90 top (schematic designator C139)
C139E "100nF" CAPC1005X55N 135.749,76.729 r90 top (schematic designator C139)
C139F "100nF" CAPC1005X55N 135.749,88.229 r90 top (schematic designator C139)
C140A "100nF" CAPC1005X55N 128.5,4.146 r180 top (schematic designator C140)
C140B "100nF" CAPC1005X55N 128.5,15.646 r180 top (schematic designator C140)
C140C "100nF" CAPC1005X55N 128.369,52.186 r180 top (schematic designator C140)
C140D "100nF" CAPC1005X55N 128.304,64.134 r180 top (schematic designator C140)
C140E "100nF" CAPC1005X55N 128.304,75.519 r180 top (schematic designator C140)
C140F "100nF" CAPC1005X55N 128.304,87.019 r180 top (schematic designator C140)
C141 "100nF" CAPC1005X55N 51.8,85.4 r0 top
C142 "100pF" CAPC1005X55N 51.3,83.9 r270 top
C143 "100nF" CAPC1005X55N 44.7,83.8 r270 top